# Allegro board DPU-C2.brd
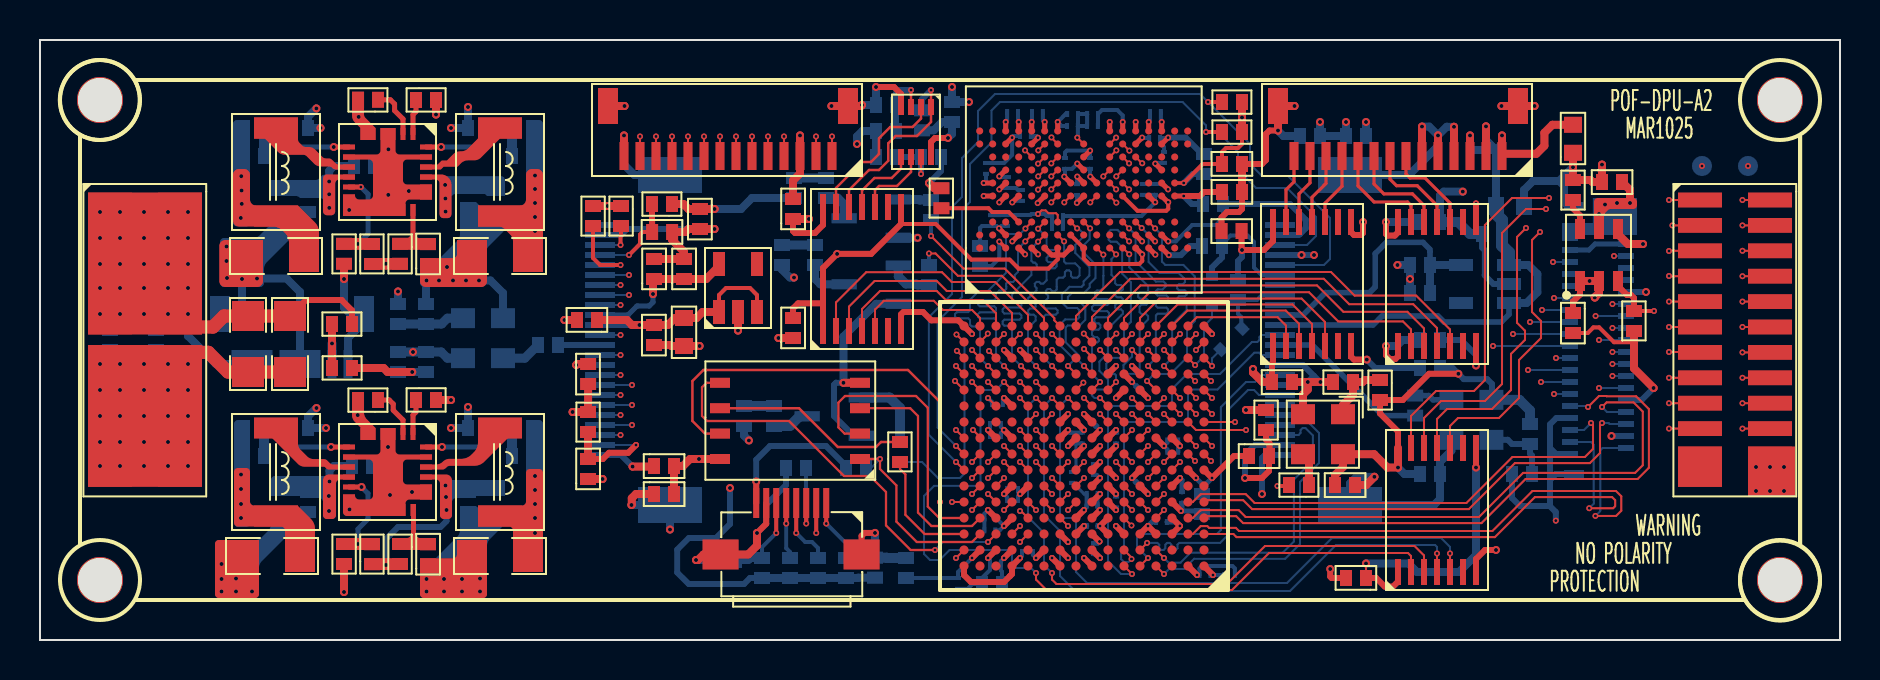
[diagram p0: board, top side]
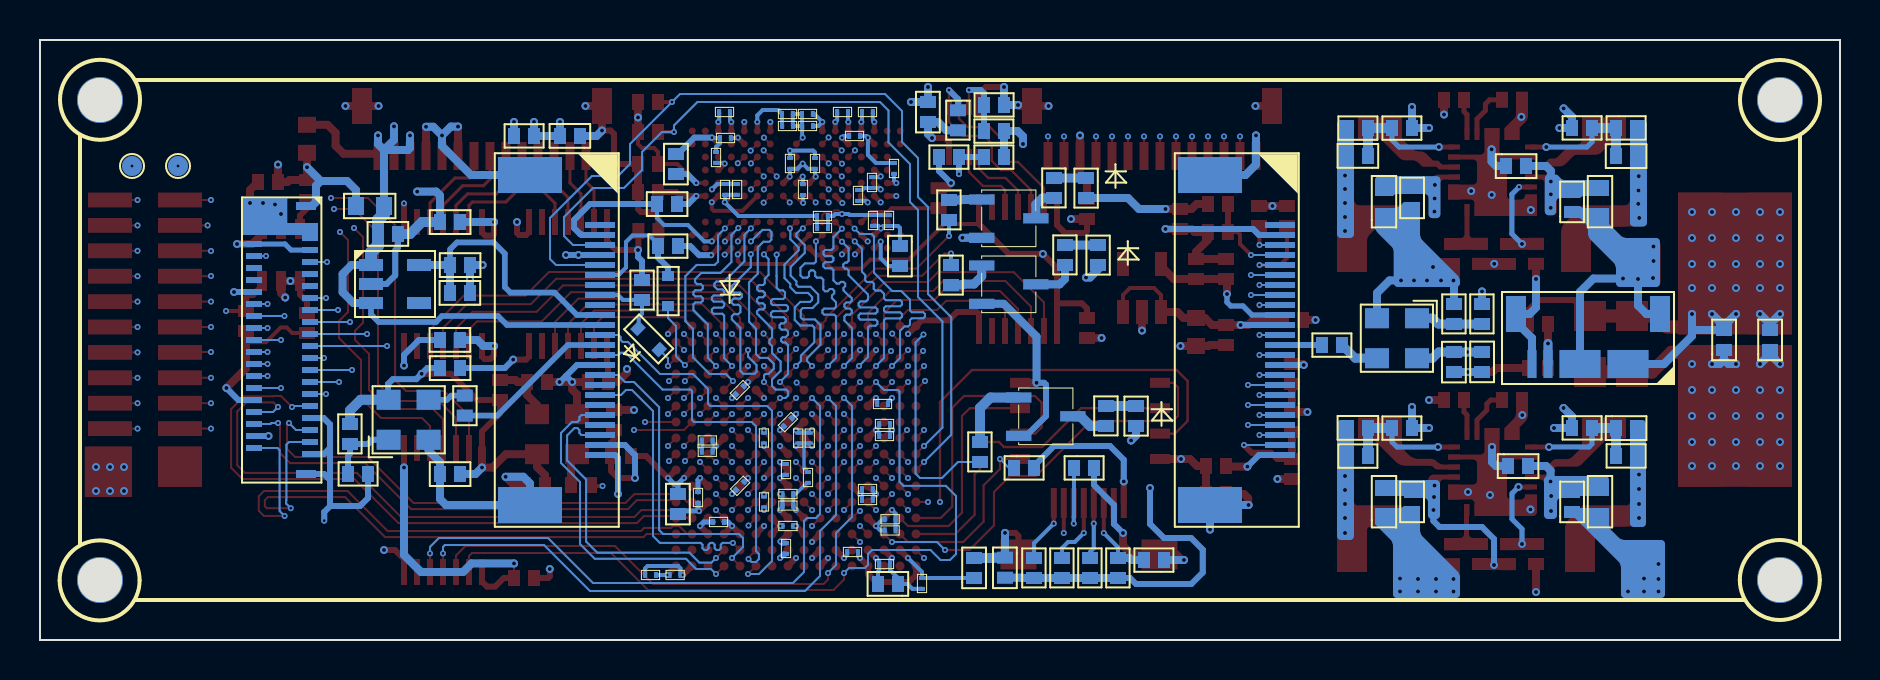
[diagram p1: board, bottom side, seen from below]

Outline 90 x 30 mm; copper layers: TOP, GND-2, SIG-3, VCC-4, GND-5, SIG-6, GND-7, BOTTOM. Coordinates in mm from the lower left corner of the outline.
Outline path: 0,30 90,30 90,0 0,0 0,30

## Design rules (mm)
constraint set DEFAULT: min track width 0.102
net group DQS0: nets DQS0N DQS0P
net group DQS1: nets DQS1N DQS1P
net group DVP_MCLK: nets DVP_MCLK N763219
net group IO_LED_1: nets IO_LED_1 N1593321
net group IO_LED_2: nets IO_LED_2 N1593325
net group IO_LED_3: nets IO_LED_3 N1593329
net group MCLK: nets MCLK N900708
net group MIPI1_CLK: nets MIPI1_CLK+ MIPI1_CLK-
net group MIPI1_D0: nets MIPI1_D0+ MIPI1_D0-
net group MIPI1_D1: nets MIPI1_D1+ MIPI1_D1-
net group MIPI2_CLK: nets MIPI2_CLK+ MIPI2_CLK-
net group MIPI2_D0: nets MIPI2_D0+ MIPI2_D0-
net group MIPI2_D1: nets MIPI2_D1+ MIPI2_D1-
net group MIPI_MCLK: nets MIPI_MCLK N2266172
net group P2V8: nets N1599549 N1613601
net group SYS_CLK: nets N990230 SYS_CLK
net group ADDRESS_BUS: nets CKE CKN CKP CS
net group MG_BT1120: nets BT1120_CLK BT1120_D0 BT1120_D1 BT1120_D2 BT1120_D3 BT1120_D4 BT1120_D5 BT1120_D6 BT1120_D7 SYNC_O
net group MG_DATABUS_0_7: nets DM0 DQ0 DQ1 DQ2 DQ3 DQ4 DQ5 DQ6 DQ7
net group MG_DATABUS_8_15: nets DM1 DQ8 DQ9 DQ10 DQ11 DQ12 DQ13 DQ14 DQ15
net group MG_DVP: nets DVP_D0 DVP_D1 DVP_D2 DVP_D3 DVP_D4 DVP_D5 DVP_D6 DVP_D7 DVP_HSYNC DVP_PCLK DVP_VSYNC
net group MG_IR_CAM: nets IR_D0 IR_D1 IR_D2 IR_D3 IR_D4 IR_D5 IR_D6 IR_D7 IR_D8 IR_D9 IR_D10 IR_D11 IR_D12 IR_D13 IR_HSYNC IR_PCLK IR_VSYNC

## Placement (name value [footprint] x y rotation side)
C1  10uF  [C0603_SMT]  76.65 24.36 90 top
C2  10uF  [C0402_SMT]  60.1 23.8 180 top
C3  10uF  [C0402_SMT]  78.1 22.9 0 top
C4  10uF  [C0402_SMT]  60.1 22.4 180 top
C5  0.1uF  [C0402_SMT]  37.65 21.05 90 top
C6  10uF  [C0402_SMT]  33 21.55 270 top
C7  0.1uF  [C0402_SMT]  59.08 20.45 0 top
C8  0.1uF  [C0402_SMT]  31.61 20.4 180 top
C9  1uF  [C0402_SMT]  19.4 18.8 90 top
C10  33uF  [C1206_SMT]  13.4 20 180 top
C11  47uF  [C1206_SMT]  24.6 20 180 top
C12  0.1uF  [C0402_SMT]  30.7 18.05 90 top
C13  10uF  [C0402_SMT]  32.2 18.05 90 top
C14  0.1uF  [C0402_SMT]  27.85 16 180 top
C15  10uF  [C0402_SMT]  76.65 16.35 270 top
C16  0.1uF  [C0402_SMT]  37.65 15.1 90 top
C17  10uF  [C0603_SMT]  32.2 16.1 270 top
C18  0.1uF  [C0402_SMT]  30.7 15.75 270 top
C19  33uF  [C1206_SMT]  9.6 16.4 270 top
C20  33uF  [C1206_SMT]  11.7 16.4 270 top
C21  10uF  [C0402_SMT]  27.41 13.8 270 top
C22  0.1uF  [C0402_SMT]  61.6 12.9 0 top
C23  0.1uF  [C0402_SMT]  60.45 9.2 0 top
C24  0.1uF  [C0402_SMT]  30.7 8.7 0 top
C25  0.1uF  [C0402_SMT]  27.4 8.05 90 top
C26  0.1uF  [C0402_SMT]  64.75 7.75 0 top
C27  10uF  [C0402_SMT]  30.7 7.3 0 top
C28  1uF  [C0402_SMT]  19.4 3.79 90 top
C29  33uF  [C1206_SMT]  13.2 5 180 top
C30  47uF  [C1206_SMT]  24.6 5 180 top
C31  0.1uF  [C0402_SMT]  66.3 3.1 180 top
C32  4.7uF  [C0201_SMT]  55.5 26.4 0 bottom
C33  0.1uF  [C0201_SMT]  49.6 26.4 0 bottom
C34  0.1uF  [C0201_SMT]  48.9 26.4 180 bottom
C35  0.1uF  [C0402_SMT]  45.6 26.9 270 bottom
C36  0.1uF  [C0201_SMT]  52.35 25.7 0 bottom
C37  0.1uF  [C0201_SMT]  51.35 25.7 0 bottom
C38  0.1uF  [C0201_SMT]  49 25.2 0 bottom
C39  4.7uF  [C0201_SMT]  56 25.1 180 bottom
C40  0.1uF  [C0402_SMT]  63 25.2 0 bottom
C41  39pF  [C0402_SMT]  23.6 24.2 0 bottom
C42  20pF  [C0402_SMT]  11.2 24.2 180 bottom
C43  0.1uF  [C0201_SMT]  56.2 24.4 270 bottom
C44  0.1uF  [C0201_SMT]  52.5 24.1 270 bottom
C45  0.1uF  [C0201_SMT]  51.25 24.1 270 bottom
C46  10uF  [C0402_SMT]  58.2 24.3 270 bottom
C47  10uF  [C0402_SMT]  16.7 23.7 180 bottom
C48  0.1uF  [C0201_SMT]  47.3 23.85 270 bottom
C49  0.1uF  [C0201_SMT]  48.4 22.6 90 bottom
C50  0.1uF  [C0201_SMT]  55.75 22.8 270 bottom
C51  0.1uF  [C0201_SMT]  51.85 22.25 90 bottom
C52  0.1uF  [C0201_SMT]  49.1 22.5 270 bottom
C53  0.1uF  [C0402_SMT]  21.4 21.6 90 bottom
C54  10uF  [C0603_SMT]  22.8 21.2 90 bottom
C55  10uF  [C0603_SMT]  12 21.2 90 bottom
C56  0.1uF  [C0402_SMT]  13.4 21.4 90 bottom
C57  10uF  [C0402_SMT]  59.15 21.8 180 bottom
C58  10uF  [C0603_SMT]  72.8 21.7 0 bottom
C59  0.1uF  [C0201_SMT]  47.55 20.7 90 bottom
C60  0.1uF  [C0402_SMT]  70 20.9 180 bottom
C61  0.1uF  [C0201_SMT]  50.6 20.6 0 bottom
C62  0.1uF  [C0402_SMT]  72.1 20.3 0 bottom
C63  10uF  [C0402_SMT]  47 19.7 270 bottom
C64  10uF  [C0402_SMT]  69.5 18.75 180 bottom
C65  0.1uF  [C0402_SMT]  68.5 17.35 0 bottom
C66  10uF  [C0402_SMT]  5.8 14.5 90 bottom
C67  10uF  [C0402_SMT]  3.5 14.5 90 bottom
C68  0.1uF  [C0402_SMT]  69 15 0 bottom
C69  10uF  [C0402_SMT]  17.9 13.4 90 bottom
C70  0.1uF  [C0402_SMT]  19.3 14.4 270 bottom
C71  4.7uF  [C0201_SMT]  55.15 22.8 270 bottom
C72  0.1uF  [C0402_SMT]  70 13.6 180 bottom
C73  0.1uF  [C0201_SMT]  55.2 12.3 135 bottom
C74  0.1uF  [C0201_SMT]  47.6 11.8 0 bottom
C75  0.1uF  [C0201_SMT]  52.8 10.7 135 bottom
C76  4.7uF  [C0201_SMT]  47.5 10.8 0 bottom
C77  200pF  [C0402_SMT]  23.6 10.6 0 bottom
C78  100pF  [C0402_SMT]  11.2 10.6 180 bottom
C79  0.1uF  [C0201_SMT]  47.5 10.2 0 bottom
C80  0.1uF  [C0201_SMT]  53.8 9.83 90 bottom
C81  0.1uF  [C0201_SMT]  52.09 10.37 270 bottom
C82  0.1uF  [C0201_SMT]  51.51 10.37 270 bottom
C83  0.1uF  [C0201_SMT]  56.91 9.98 180 bottom
C84  4.7uF  [C0201_SMT]  56.91 9.41 180 bottom
C85  10uF  [C0402_SMT]  16.6 8.7 180 bottom
C86  0.1uF  [C0201_SMT]  52.7 8.8 270 bottom
C87  0.1uF  [C0402_SMT]  70 8.3 180 bottom
C88  4.7uF  [C0201_SMT]  51.6 8.4 270 bottom
C89  0.1uF  [C0201_SMT]  54.8 7.9 315 bottom
C90  4.7uF  [C0201_SMT]  48.9 7.55 180 bottom
C91  4.7uF  [C0201_SMT]  52.88 7.3 180 bottom
C92  0.1uF  [C0201_SMT]  57.1 7.4 270 bottom
C93  0.1uF  [C0201_SMT]  48.9 7 180 bottom
C94  10uF  [C0603_SMT]  22.8 6.2 90 bottom
C95  10uF  [C0603_SMT]  12 6.2 90 bottom
C96  0.1uF  [C0402_SMT]  21.4 6.4 90 bottom
C97  0.1uF  [C0402_SMT]  13.4 6.4 90 bottom
C98  4.7uF  [C0201_SMT]  53.8 6.63 90 bottom
C99  10uF  [C0402_SMT]  58.1 7.3 270 bottom
C100  0.1uF  [C0201_SMT]  52.33 6.72 0 bottom
C101  4.7uF  [C0201_SMT]  47.22 6.04 0 bottom
C102  0.1uF  [C0201_SMT]  55.8 5.9 0 bottom
C103  0.1uF  [C0201_SMT]  52.88 5.7 180 bottom
C104  0.1uF  [C0201_SMT]  47.22 5.48 0 bottom
C105  0.1uF  [C0201_SMT]  52.7 4.3 90 bottom
C106  0.1uF  [C0201_SMT]  49.1 4.4 0 bottom
C107  0.1uF  [C0201_SMT]  47.5 3.8 0 bottom
C108  10uF  [C0402_SMT]  43.3 3.1 90 bottom
C109  10uF  [C0402_SMT]  41.75 4.11 270 bottom
C110  0.1uF  [C0201_SMT]  59.2 3.25 0 bottom
C111  0.1uF  [C0201_SMT]  58.52 3.25 180 bottom
C112  0.1uF  [C0201_SMT]  45.9 3.1 270 bottom
C113  10uF  [C0402_SMT]  47.1 2.8 0 bottom
D1  LED  [LED0402_SMT]  37.7 23.1 270 bottom
D2  LED  [LED0402_SMT]  37.1 19.75 270 bottom
D3  1N5819WT  [SOD-523]  58.6 16.7 90 bottom
D4  1N5819WT  [SOD-523]  59.04 14.52 45 bottom
D5  LED  [LED0402_SMT]  35.2 11.7 270 bottom
FB1  BLM18PG121SN1D  [L0402_SMT]  31.6 21.8 180 top
FB2  BLM18PG121SN1D  [L0402_SMT]  61.3 11.5 270 top
FB3  BLM18PG121SN1D  [L0402_SMT]  27.4 11.4 270 top
FB4  BLM18PG121SN1D  [L0402_SMT]  66.3 25.2 180 bottom
J1  CONN-1X14P-0.8MM  [CONN-1X14P-0D8]  39.6 24.2 180 top
J2  CONN-1X14P-0.8MM  [CONN-1X14P-0D8]  73.1 24.2 180 top
J3  CONN-24P  [SMD_CONN_2X12P_1D27]  7 22 270 top
J4  CONN-24P  [SMD_CONN_2X12P_1D27]  86.5 22 270 top
J5  CONN-1X8  [FPC-0D5-8P]  39.31 6.85 180 top
J6  CONN-1X8P-0.8MM  [CONN-1X8P-0D8]  9.8 13.8 0 bottom
J7  Hirose FH35C-39S-0.3SHW  [FH35C-39S-0D3SHW]  76.5 15 90 bottom
J8  FPC-05F-24PH20  [FPC-0D5-24P]  62 20.75 270 bottom
J9  FPC-05F-24PH20  [FPC-0D5-24P]  28 20.75 270 bottom
L1  1uH/1A  [IND_SMD_4D4X4D2]  11.8 25.6 270 top
L2  1uH/1A  [IND_SMD_4D4X4D2]  23 25.6 270 top
L3  1uH/1A  [IND_SMD_4D4X4D2]  11.8 10.6 270 top
L4  1uH/1A  [IND_SMD_4D4X4D2]  23 10.6 270 top
NOREF  -  [unnamed]  87 3 0 top
NOREF#2  -  [#2]  0 0 90 top
NOREF#3  -  [unnamed]  3 27 0 top
NOREF#4  -  [unnamed]  3 3 0 top
NOREF#5  -  [unnamed]  87 27 0 top
NOREF#6  -  [#2]  0 30 0 top
Q1  MMBT2222ALT1G  [SOT-23-3]  43.35 22.5 270 bottom
Q2  MMBT2222ALT1G  [SOT-23-3]  43.35 19.2 270 bottom
Q3  MMBT2222ALT1G  [SOT-23-3]  41.5 12.6 270 bottom
R1  10K  [R0402_SMT]  16.9 27.01 180 top
R2  10K  [R0402_SMT]  18.8 27 0 top
R3  10K  [R0402_SMT]  60.1 26.9 180 top
R4  10K  [R0402_SMT]  60.1 25.4 180 top
R5  1K  [R0402_SMT]  76.64 23 270 top
R6  240R  [R0402_SMT]  45.07 21.59 90 top
R7  10K  [R0402_SMT]  27.65 21.7 270 top
R8  10K  [R0402_SMT]  29.05 21.7 270 top
R9  DNP  [R0402_SMT]  15.2 19.81 270 top
R10  0  [R0402_SMT]  16.6 18.8 90 top
R11  10  [R0402_SMT]  18 19.81 270 top
R12  100K  [R0402_SMT]  79.7 15.45 90 top
R13  0  [R0402_SMT]  15.6 15.8 180 top
R14  DNP  [R0402_SMT]  14.6 13.6 0 top
R15  DNP  [R0402_SMT]  65.65 12.9 180 top
R16  0R  [R0402_SMT]  67 13 270 top
R17  10K  [R0402_SMT]  18.8 12 0 top
R18  10K  [R0402_SMT]  16.9 12 180 top
R19  33  [R0402_SMT]  43 8.9 90 top
R20  33  [R0402_SMT]  63.45 7.75 180 top
R21  DNP  [R0402_SMT]  15.2 4.8 270 top
R22  0  [R0402_SMT]  16.6 3.79 90 top
R23  10  [R0402_SMT]  18 4.8 270 top
R24  DNP  [R0402_SMT]  42.8 26.75 180 bottom
R25  10K  [R0201_SMT]  52.9 26.3 180 bottom
R26  10K  [R0201_SMT]  51.9 26.3 180 bottom
R27  10K  [R0402_SMT]  44.1 25.48 90 bottom
R28  48K  [R0402_SMT]  13.4 25.6 180 bottom
R29  120K  [R0402_SMT]  11.2 25.6 180 bottom
R30  125K  [R0402_SMT]  23.6 25.6 0 bottom
R31  100K  [R0402_SMT]  21.4 25.6 0 bottom
R32  10K  [R0402_SMT]  41.8 25.45 0 bottom
R33  DNP  [R0402_SMT]  44.05 24.15 0 bottom
R34  10K  [R0402_SMT]  41.8 24.15 0 bottom
R35  20K  [R0402_SMT]  39.3 22.1 90 bottom
R36  1K  [R0402_SMT]  44.55 21 90 bottom
R37  10K  [R0201_SMT]  51.15 21.2 180 bottom
R38  10K  [R0201_SMT]  48.35 21.25 270 bottom
R39  4.7K  [R0402_SMT]  58.1 19.7 0 bottom
R40  20K  [R0402_SMT]  38.75 18.75 90 bottom
R41  1K  [R0402_SMT]  44.45 18.75 270 bottom
R42  4.7K  [R0402_SMT]  59.9 18 270 bottom
R43  DNP  [R0402_SMT]  19.3 15.8 90 bottom
R44  0R  [R0402_SMT]  17.9 15.8 90 bottom
R45  33  [R0402_SMT]  24.9 14.75 0 bottom
R46  33  [R0402_SMT]  68.76 12.22 270 bottom
R47  20K  [R0402_SMT]  36.7 10.7 90 bottom
R48  100K  [R0402_SMT]  13.4 10.6 180 bottom
R49  100K  [R0402_SMT]  21.4 10.6 0 bottom
R50  0R  [R0402_SMT]  74.5 9.8 90 bottom
R51  1K  [R0402_SMT]  43 8.9 90 bottom
R52  49.9K  [R0402_SMT]  11.2 9.2 180 bottom
R53  24.9K  [R0402_SMT]  23.6 9.2 0 bottom
R54  4.7K  [R0402_SMT]  41.3 8.6 180 bottom
R55  2.2K  [R0402_SMT]  38.3 8.6 180 bottom
R56  DNP  [R0402_SMT]  74.6 8.3 180 bottom
R57  DNP  [R0402_SMT]  33.8 4 0 bottom
R58  4.7K  [R0402_SMT]  40.3 3.1 90 bottom
R59  4.7K  [R0402_SMT]  38.9 3.1 90 bottom
R60  4.7K  [R0402_SMT]  37.5 3.1 90 bottom
R61  0R  [R0402_SMT]  36.1 3.1 90 bottom
TP1  T POINT R  [TP_SMD_1D0_NP]  85.4 23.7 180 bottom
TP2  T POINT R  [TP_SMD_1D0_NP]  83.1 23.7 180 bottom
U1  CAT25512HU5I-GT3  [UDFN-8-2X3]  44.55 24.15 180 top
U2  MAX20416ATGD/V+  [TQFN-24]  17.4 23.4 180 top
U3  IS43LD16640C-25BLI  [BGA-134-0D65]  46.98 19.6 90 top
U4  TPS22995H-Q1  [SOT-23-6]  77 17.95 90 top
U5  TXB0104PWR  [TSSOP-14]  39.15 15.45 90 top
U6  TXB0104PWR  [TSSOP-14]  61.65 14.7 90 top
U7  TXB0104PWR  [TSSOP-14]  67.9 14.7 90 top
U8  TLV75515PDBVR  [SOT-23-5]  33.95 16.4 90 top
U9  GD25Q128ESIGR  [SOP-8-208MIL]  34 9.05 90 top
U10  LIFCL-40-BG256  [CABGA-256]  58.2 3.7 180 top
U11  MAX20416ATGD/V+  [TQFN-24]  17.4 8.4 180 top
U12  TXB0104PWR  [TSSOP-14]  67.9 3.4 90 top
U13  TLV75515PDBVR  [SOT-23-5]  73.45 18.75 180 bottom
Y1  25.0MHz  [SMD2520-4P]  64.15 10.25 180 top
Y2  24.0MHz  [SMD2520-4P]  22.15 15.05 0 bottom
Y3  24.0MHz  [SMD2520-4P]  71.57 11.05 180 bottom

## Library data of the parts
C1 C10 C11 C13 C17 C19 C20 C29 C30 C58 C64 = CAP NP: signal model: DEFAULT_CAPACITOR_2.2e+07pF_2_1
C2-C9 C12 C14-C16 C18 C21-C28 C31-C57 C59-C63 C65-C113 = CAP NP: signal model: DEFAULT_CAPACITOR_1e+07pF_2_1
D1 D2 D5 = LED
D3 D4 = DIODE
FB1-FB4 = INDUCTOR
J1 J2 = CONN-1X14P
J3 J4 = CONN-24P
J5 = CONN-1X8
J6 = CONN-1X8P
J7 = HiroseFPC_0
J8 = OV5640-FPC-24P-MIPI
J9 = OV5640-FPC-24P-DVP
L1-L4 = INDUCTOR: signal model: DEFAULT_INDUCTOR_4700nH_2_1
Q1-Q3 = MMBT2222AL
R1-R4 R7-R11 R13-R24 R27-R34 R36 R39 R41-R46 R48-R61 = R: signal model: DEFAULT_RESISTOR_10000OHM_2_1
R5 R6 R12 R25 R26 R35 R37 R38 R40 R47 = R
TP1 TP2 = T POINT R
U1 = CAT25512HU5I-GT3
U2 U11 = MAX20416ATGD/V+
U3 = IS43LD16640C-25BLI
U4 = TPS22995H-Q1
U5-U7 U12 = TXB0104PWR
U8 U13 = TLV75515PDBVR
U9 = GD25Q128ESIGR
U10 = LIFCL-40-BG256
Y1-Y3 = OSCILLATOR

## Footprints (pads in the part's own frame, mm; a bottom-side part is the same pattern mirrored in y, then rotated)
BGA-134-0D65
  round 0.35 smd: A1(0,0) A2(0.65,0) A9(5.2,0) A10(5.85,0) B1(0,-0.65) B2(0.65,-0.65) B3(1.3,-0.65) B5(2.6,-0.65) B6(3.25,-0.65) B7(3.9,-0.65) B8(4.55,-0.65) B9(5.2,-0.65) B10(5.85,-0.65) C1(0,-1.3) C2(0.65,-1.3) C3(1.3,-1.3) C5(2.6,-1.3) C6(3.25,-1.3) C7(3.9,-1.3) C8(4.55,-1.3) C9(5.2,-1.3) C10(5.85,-1.3) D1(0,-1.95) D2(0.65,-1.95) D3(1.3,-1.95) D5(2.6,-1.95) D6(3.25,-1.95) D7(3.9,-1.95) D8(4.55,-1.95) D9(5.2,-1.95) D10(5.85,-1.95) E1(0,-2.6) E2(0.65,-2.6) E3(1.3,-2.6) E5(2.6,-2.6) E6(3.25,-2.6) E7(3.9,-2.6) E8(4.55,-2.6) E9(5.2,-2.6) E10(5.85,-2.6) F1(0,-3.25) F2(0.65,-3.25) F3(1.3,-3.25) F5(2.6,-3.25) F6(3.25,-3.25) F7(3.9,-3.25) F8(4.55,-3.25) F9(5.2,-3.25) F10(5.85,-3.25) G1(0,-3.9) G2(0.65,-3.9) G3(1.3,-3.9) G5(2.6,-3.9) G6(3.25,-3.9) G7(3.9,-3.9) G8(4.55,-3.9) G9(5.2,-3.9) G10(5.85,-3.9) H1(0,-4.55) H2(0.65,-4.55) H3(1.3,-4.55) H5(2.6,-4.55) H6(3.25,-4.55) J1(0,-5.2) J2(0.65,-5.2) J3(1.3,-5.2) J5(2.6,-5.2) J6(3.25,-5.2) J7(3.9,-5.2) J8(4.55,-5.2) J9(5.2,-5.2) K1(0,-5.85) K2(0.65,-5.85) K3(1.3,-5.85) K5(2.6,-5.85) K6(3.25,-5.85) L1(0,-6.5) L2(0.65,-6.5) L3(1.3,-6.5) L5(2.6,-6.5) L6(3.25,-6.5) L7(3.9,-6.5) L8(4.55,-6.5) L9(5.2,-6.5) L10(5.85,-6.5) M1(0,-7.15) M2(0.65,-7.15) M3(1.3,-7.15) M5(2.6,-7.15) M6(3.25,-7.15) M7(3.9,-7.15) M8(4.55,-7.15) M9(5.2,-7.15) M10(5.85,-7.15) N1(0,-7.8) N2(0.65,-7.8) N3(1.3,-7.8) N5(2.6,-7.8) N6(3.25,-7.8) N7(3.9,-7.8) N8(4.55,-7.8) N9(5.2,-7.8) N10(5.85,-7.8) P1(0,-8.45) P2(0.65,-8.45) P3(1.3,-8.45) P5(2.6,-8.45) P6(3.25,-8.45) P7(3.9,-8.45) P8(4.55,-8.45) P9(5.2,-8.45) P10(5.85,-8.45) R1(0,-9.1) R2(0.65,-9.1) R3(1.3,-9.1) R5(2.6,-9.1) R6(3.25,-9.1) R7(3.9,-9.1) R8(4.55,-9.1) R9(5.2,-9.1) R10(5.85,-9.1) T1(0,-9.75) T2(0.65,-9.75) T3(1.3,-9.75) T5(2.6,-9.75) T6(3.25,-9.75) T7(3.9,-9.75) T8(4.55,-9.75) T9(5.2,-9.75) T10(5.85,-9.75) U1(0,-10.4) U2(0.65,-10.4) U9(5.2,-10.4) U10(5.85,-10.4)
C0201_SMT
  rect 0.2x0.3 smd: 1(0,0) 2(0.544,0)
C0402_SMT
  rect 0.6x0.8 smd: 1(0,0) 2(1,0)
C0603_SMT
  rect 0.8x0.9 smd: 1(0,0) 2(1.4,0)
C1206_SMT
  rect 1.5x1.6 smd: 1(0.2,0.8) 2(3,0.8)
CABGA-256
  round 0.45 smd: A1(0,0) A2(0.8,0) A3(1.6,0) A4(2.4,0) A5(3.2,0) A6(4,0) A7(4.8,0) A8(5.6,0) A9(6.4,0) A10(7.2,0) A11(8,0) A12(8.8,0) A13(9.6,0) A14(10.4,0) A15(11.2,0) A16(12,0) B1(0,-0.8) B2(0.8,-0.8) B3(1.6,-0.8) B4(2.4,-0.8) B5(3.2,-0.8) B6(4,-0.8) B7(4.8,-0.8) B8(5.6,-0.8) B9(6.4,-0.8) B10(7.2,-0.8) B11(8,-0.8) B12(8.8,-0.8) B13(9.6,-0.8) B14(10.4,-0.8) B15(11.2,-0.8) B16(12,-0.8) C1(0,-1.6) C2(0.8,-1.6) C3(1.6,-1.6) C4(2.4,-1.6) C5(3.2,-1.6) C6(4,-1.6) C7(4.8,-1.6) C8(5.6,-1.6) C9(6.4,-1.6) C10(7.2,-1.6) C11(8,-1.6) C12(8.8,-1.6) C13(9.6,-1.6) C14(10.4,-1.6) C15(11.2,-1.6) C16(12,-1.6) D1(0,-2.4) D2(0.8,-2.4) D3(1.6,-2.4) D4(2.4,-2.4) D5(3.2,-2.4) D6(4,-2.4) D7(4.8,-2.4) D8(5.6,-2.4) D9(6.4,-2.4) D10(7.2,-2.4) D11(8,-2.4) D12(8.8,-2.4) D13(9.6,-2.4) D14(10.4,-2.4) D15(11.2,-2.4) D16(12,-2.4) E1(0,-3.2) E2(0.8,-3.2) E3(1.6,-3.2) E4(2.4,-3.2) E5(3.2,-3.2) E6(4,-3.2) E7(4.8,-3.2) E8(5.6,-3.2) E9(6.4,-3.2) E10(7.2,-3.2) E11(8,-3.2) E12(8.8,-3.2) E13(9.6,-3.2) E14(10.4,-3.2) E15(11.2,-3.2) E16(12,-3.2) F1(0,-4) F2(0.8,-4) F3(1.6,-4) F4(2.4,-4) F5(3.2,-4) F6(4,-4) F7(4.8,-4) F8(5.6,-4) F9(6.4,-4) F10(7.2,-4) F11(8,-4) F12(8.8,-4) F13(9.6,-4) F14(10.4,-4) F15(11.2,-4) F16(12,-4) G1(0,-4.8) G2(0.8,-4.8) G3(1.6,-4.8) G4(2.4,-4.8) G5(3.2,-4.8) G6(4,-4.8) G7(4.8,-4.8) G8(5.6,-4.8) G9(6.4,-4.8) G10(7.2,-4.8) G11(8,-4.8) G12(8.8,-4.8) G13(9.6,-4.8) G14(10.4,-4.8) G15(11.2,-4.8) G16(12,-4.8) H1(0,-5.6) H2(0.8,-5.6) H3(1.6,-5.6) H4(2.4,-5.6) H5(3.2,-5.6) H6(4,-5.6) H7(4.8,-5.6) H8(5.6,-5.6) H9(6.4,-5.6) H10(7.2,-5.6) H11(8,-5.6) H12(8.8,-5.6) H13(9.6,-5.6) H14(10.4,-5.6) H15(11.2,-5.6) H16(12,-5.6) J1(0,-6.4) J2(0.8,-6.4) J3(1.6,-6.4) J4(2.4,-6.4) J5(3.2,-6.4) J6(4,-6.4) J7(4.8,-6.4) J8(5.6,-6.4) J9(6.4,-6.4) J10(7.2,-6.4) J11(8,-6.4) J12(8.8,-6.4) J13(9.6,-6.4) J14(10.4,-6.4) J15(11.2,-6.4) J16(12,-6.4) K1(0,-7.2) K2(0.8,-7.2) K3(1.6,-7.2) K4(2.4,-7.2) K5(3.2,-7.2) K6(4,-7.2) K7(4.8,-7.2) K8(5.6,-7.2) K9(6.4,-7.2) K10(7.2,-7.2) K11(8,-7.2) K12(8.8,-7.2) K13(9.6,-7.2) K14(10.4,-7.2) K15(11.2,-7.2) K16(12,-7.2) L1(0,-8) L2(0.8,-8) L3(1.6,-8) L4(2.4,-8) L5(3.2,-8) L6(4,-8) L7(4.8,-8) L8(5.6,-8) L9(6.4,-8) L10(7.2,-8) L11(8,-8) L12(8.8,-8) L13(9.6,-8) L14(10.4,-8) L15(11.2,-8) L16(12,-8) M1(0,-8.8) M2(0.8,-8.8) M3(1.6,-8.8) M4(2.4,-8.8) M5(3.2,-8.8) M6(4,-8.8) M7(4.8,-8.8) M8(5.6,-8.8) M9(6.4,-8.8) M10(7.2,-8.8) M11(8,-8.8) M12(8.8,-8.8) M13(9.6,-8.8) M14(10.4,-8.8) M15(11.2,-8.8) M16(12,-8.8) N1(0,-9.6) N2(0.8,-9.6) N3(1.6,-9.6) N4(2.4,-9.6) N5(3.2,-9.6) N6(4,-9.6) N7(4.8,-9.6) N8(5.6,-9.6) N9(6.4,-9.6) N10(7.2,-9.6) N11(8,-9.6) N12(8.8,-9.6) N13(9.6,-9.6) N14(10.4,-9.6) N15(11.2,-9.6) N16(12,-9.6) P1(0,-10.4) P2(0.8,-10.4) P3(1.6,-10.4) P4(2.4,-10.4) P5(3.2,-10.4) P6(4,-10.4) P7(4.8,-10.4) P8(5.6,-10.4) P9(6.4,-10.4) P10(7.2,-10.4) P11(8,-10.4) P12(8.8,-10.4) P13(9.6,-10.4) P14(10.4,-10.4) P15(11.2,-10.4) P16(12,-10.4) R1(0,-11.2) R2(0.8,-11.2) R3(1.6,-11.2) R4(2.4,-11.2) R5(3.2,-11.2) R6(4,-11.2) R7(4.8,-11.2) R8(5.6,-11.2) R9(6.4,-11.2) R10(7.2,-11.2) R11(8,-11.2) R12(8.8,-11.2) R13(9.6,-11.2) R14(10.4,-11.2) R15(11.2,-11.2) R16(12,-11.2) T1(0,-12) T2(0.8,-12) T3(1.6,-12) T4(2.4,-12) T5(3.2,-12) T6(4,-12) T7(4.8,-12) T8(5.6,-12) T9(6.4,-12) T10(7.2,-12) T11(8,-12) T12(8.8,-12) T13(9.6,-12) T14(10.4,-12) T15(11.2,-12) T16(12,-12)
CONN-1X8P-0D8
  rect 0.45x1.4 smd: 1(0,0) 2(0.8,0) 3(1.6,0) 4(2.4,0) 5(3.2,0) 6(4,0) 7(4.8,0) 8(5.6,0)
  rect 1x1.8 smd: 9(-0.8,-2.5) 10(6.4,-2.5)
CONN-1X14P-0D8
  rect 0.45x1.4 smd: 1(0,0) 2(0.8,0) 3(1.6,0) 4(2.4,0) 5(3.2,0) 6(4,0) 7(4.8,0) 8(5.6,0) 9(6.4,0) 10(7.2,0) 11(8,0) 12(8.8,0) 13(9.6,0) 14(10.4,0)
  rect 1x1.8 smd: 15(11.2,-2.5) 16(-0.8,-2.5)
FH35C-39S-0D3SHW
  rect 0.3x0.8 smd: 1(5.7,0) 2(5.4,2.8) 3(5.1,0) 4(4.8,2.8) 5(4.5,0) 6(4.2,2.8) 7(3.9,0) 8(3.6,2.8) 9(3.3,0) 10(3,2.8) 11(2.7,0) 12(2.4,2.8) 13(2.1,0) 14(1.8,2.8) 15(1.5,0) 16(1.2,2.8) 17(0.9,0) 18(0.6,2.8) 19(0.3,0) 20(0,2.8) 21(-0.3,0) 22(-0.6,2.8) 23(-0.9,0) 24(-1.2,2.8) 25(-1.5,0) 26(-1.8,2.8) 27(-2.1,0) 28(-2.4,2.8) 29(-2.7,0) 30(-3,2.8) 31(-3.3,0) 32(-3.6,2.8) 33(-3.9,0) 34(-4.2,2.8) 35(-4.5,0) 36(-4.8,2.8) 37(-5.1,0) 38(-5.4,2.8) 39(-5.7,0)
  rect 0.4x1 smd: 40(6.7,0.2) 41(-6.7,0.2)
FPC-0D5-8P
  rect 0.3x1.5 smd: 1(0,0) 2(0.5,0) 3(1,0) 4(1.5,0) 5(2,0) 6(2.5,0) 7(3,0) 8(3.5,0)
  rect 1.8x1.5 smd: 9(-1.767,2.573) 10(5.283,2.573)
FPC-0D5-24P
  rect 0.3x1.5 smd: 1(0,0) 2(0.5,0) 3(1,0) 4(1.5,0) 5(2,0) 6(2.5,0) 7(3,0) 8(3.5,0) 9(4,0) 10(4.5,0) 11(5,0) 12(5.5,0) 13(6,0) 14(6.5,0) 15(7,0) 16(7.5,0) 17(8,0) 18(8.5,0) 19(9,0) 20(9.5,0) 21(10,0) 22(10.5,0) 23(11,0) 24(11.5,0)
  rect 1.8x3.2 smd: 25(-2.5,-3.5) 26(14,-3.5)
IND_SMD_4D4X4D2
  rect 1.05x2.2 smd: 1(0,0) 2(4.4,0)
L0402_SMT
  rect 0.6x0.8 smd: 1(0,0) 2(1,0)
LED0402_SMT
  rect 0.6x0.8 smd: 1(0,0) 2(1,0)
R0201_SMT
  rect 0.2x0.3 smd: 1(0,0) 2(0.544,0)
R0402_SMT
  rect 0.6x0.8 smd: 1(0,0) 2(1,0)
SMD2520-4P
  rect 1.2x1 smd: 1(-1,-1.04) 2(1,-1.04) 3(1,0.96) 4(-1,0.96)
SMD_CONN_2X12P_1D27
  rect 0.74x2.2 smd: 1(0,-3.5) 2(1.27,-3.5) 3(2.54,-3.5) 4(3.81,-3.5) 5(5.08,-3.5) 6(6.35,-3.5) 7(7.62,-3.5) 8(8.89,-3.5) 9(10.16,-3.5) 10(11.43,-3.5) 11(12.7,-3.5) 12(13.97,-3.5) 13(13.97,0) 14(12.7,0) 15(11.43,0) 16(10.16,0) 17(8.89,0) 18(7.62,0) 19(6.35,0) 20(5.08,0) 21(3.81,0) 22(2.54,0) 23(1.27,0) 24(0,0)
SOD-523
  rect 0.5x0.6 smd: 1(0,0) 2(1.5,0)
SOP-8-208MIL
  rect 0.5x1 smd: 1(0,-7) 2(1.27,-7) 3(2.54,-7) 4(3.81,-7) 5(3.81,0) 6(2.54,0) 7(1.27,0) 8(0,0)
SOT-23-3
  rect 0.51x1.27 smd: 1(0.476,0.434) 2(2.391,0.434) 3(1.415,3.142)
SOT-23-5
  rect 1.2x0.6 smd: 1(0,0) 2(0,-0.95) 3(0,-1.9) 4(2.4,-1.9) 5(2.4,0)
SOT-23-6
  rect 1x0.5 smd: 1(0,0) 2(0,-0.95) 3(0,-1.9) 4(2.6,-1.9) 5(2.6,-0.95) 6(2.6,0)
TP_SMD_1D0_NP
  round 1 smd: 1(0,0)
TQFN-24
  rect 0.25x0.6 smd: 1(-1.25,-1.9) 2(-0.75,-1.9) 3(-0.25,-1.9) 4(0.25,-1.9) 5(0.75,-1.9) 6(1.25,-1.9) 13(1.25,1.9) 14(0.75,1.9) 15(0.25,1.9) 16(-0.25,1.9) 17(-0.75,1.9) 18(-1.25,1.9)
  rect 0.6x0.25 smd: 7(1.95,-1.25) 8(1.95,-0.75) 9(1.95,-0.25) 10(1.95,0.25) 11(1.95,0.75) 12(1.95,1.25) 19(-1.9,1.25) 20(-1.9,0.75) 21(-1.9,0.25) 22(-1.9,-0.25) 23(-1.9,-0.75) 24(-1.9,-1.25)
  rect 1.5x1.5 smd: EPAD(0,0)
TSSOP-14
  rect 1.3x0.3 smd: 1(0,0) 2(0,-0.65) 3(0,-1.3) 4(0,-1.95) 5(0,-2.6) 6(0,-3.25) 7(0,-3.9) 8(6.2,-3.9) 9(6.2,-3.25) 10(6.2,-2.6) 11(6.2,-1.95) 12(6.2,-1.3) 13(6.2,-0.65) 14(6.2,0)
UDFN-8-2X3
  rect 0.3x0.8 smd: 1(0,-2.5) 2(0.5,-2.5) 3(1,-2.5) 4(1.5,-2.5) 5(1.5,0) 6(1,0) 7(0.5,0) 8(0,0)
unnamed
  round 2.3 hole 2.2 unplated: (0,0)

## Nets
GND: C1.1 C2.1 C3.1 C4.1 C5.2 C6.2 C7.1 C8.1 C9.1 C10.2 C11.2 C12.2 C13.2 C14.2 C15.2 C16.1 C17.2 C18.2 C19.2 C20.2 C21.1 C22.2 C23.1 C24.1 C25.1 C26.2 C27.1 C28.1 C29.2 C30.2 C31.2 C32.1 C33.1 C34.1 C35.1 C37.1 C38.1 C39.1 C40.1 C43.1 C44.1 C45.1 C46.1 C47.1 C48.1 C49.1 C50.1 C51.1 C52.1 C53.1 C54.1 C55.1 C56.1 C57.1 C58.2 C59.1 C60.1 C62.1 C63.1 C64.2 C65.1 C66.1 C67.1 C68.2 C69.1 C70.2 C71.1 C72.2 C73.1 C74.2 C75.1 C76.1 C79.1 C80.2 C81.2 C82.2 C83.1 C84.1 C85.1 C86.1 C87.1 C88.1 C89.1 C90.1 C91.1 C92.1 C93.1 C94.1 C95.1 C96.1 C97.1 C98.1 C99.1 C100.2 C101.1 C102.2 C103.2 C104.1 C105.1 C106.1 C107.1 C108.2 C109.1 C110.1 C111.1 C112.2 C113.1 J1.3 J1.14 J1.15 J1.16 J2.4 J2.5 J2.6 J2.15 J2.16 J3.7 J3.8 J3.9 J3.10 J3.11 J3.12 J3.13 J3.14 J3.15 J3.16 J3.17 J3.18 J4.13 J4.14 J5.7 J5.9 J5.10 J6.4 J6.5 J6.6 J6.8 J6.9 J6.10 J7.4 J7.5 J7.12 J7.30 J7.33 J7.36 J7.39 J7.40 J7.41 J8.2 J8.15 J8.24 J8.25 J8.26 J9.2 J9.15 J9.24 J9.25 J9.26 Q1.2(EMITTER) Q2.2(EMITTER) Q3.2(EMITTER) R5.1 R6.2 R9.2 R12.1 R14.2 R15.2 R21.2 R24.2 R26.2 R28.1 R31.1 R33.2 R38.2 R43.2 R48.1 R49.1 R55.2 R56.2 R57.1 U1.4 U2.3 U2.4 U2.8 U2.12 U2.13 U2.14 U2.15 U2.16 U2.17 U2.19 U2.20 U2.23 U2.EPAD U3.C2 U3.C5 U3.C6 U3.C9 U3.D1 U3.D10 U3.E1 U3.E10 U3.F5 U3.G10 U3.H2 U3.J1 U3.J5 U3.J8 U3.L10 U3.M5 U3.N1 U3.N10 U3.P1 U3.P10 U3.R2 U3.R5 U3.R6 U3.R9 U4.4 U5.7 U6.7 U7.7 U8.2 U9.4 U10.A1 U10.A8 U10.A10 U10.A13 U10.A16 U10.B8 U10.B10 U10.B14(VSSSD#B14) U10.C3 U10.C6 U10.C9 U10.C10 U10.D3 U10.D8 U10.D14 U10.E7 U10.E8 U10.F3 U10.F12 U10.G1 U10.G2 U10.G5 U10.G8 U10.H8 U10.H9 U10.J3 U10.J7 U10.J8 U10.J9 U10.J14 U10.L13 U10.M5 U10.N7 U10.P13 U10.T1 U10.T16 U11.3 U11.4 U11.8 U11.12 U11.13 U11.14 U11.15 U11.16 U11.17 U11.19 U11.20 U11.23 U11.EPAD U12.7 U13.2 Y1.2 Y2.2 Y3.2
P1V0: C30.1 C77.2 C80.1 C81.1 C82.1 C88.2 C91.2 C100.1 C102.1 C103.1 C108.1 C110.2 C111.2 C112.1 L4.2 R53.2 U10.A2 U10.B15 U10.C4 U10.C5 U10.C7 U10.D7 U10.D9 U10.H7 U10.J10 U10.K9
P1V2: C4.2 C16.2 C22.1 C29.1 C31.1 C32.2 C33.2 C34.2 C36.2 C38.2 C39.2 C43.2 C44.2 C45.2 C49.2 C50.2 C51.2 C52.2 C57.2 C61.2 C68.1 C71.2 C73.2 C78.2 L3.2 R25.1 R37.1 R52.2 U3.B5 U3.C7 U3.C10 U3.D2 U3.D5 U3.E9 U3.F1 U3.F10 U3.G1 U3.H1 U3.H6 U3.J6 U3.J7 U3.K6 U3.M10 U3.N2 U3.N9 U3.P2 U3.P5 U3.R7 U3.R10 U3.T5 U5.1 U5.8 U6.1 U6.8 U7.1 U7.8 U10.N5 U10.N6 U10.P12 U12.1 U12.8
P1V5: C12.1 C13.1 J9.10 U8.5(OUT)
P1V5_MIPI: C64.1 C65.2 J8.10 U13.5(OUT)
P1V8: C1.2 C2.2 C5.1 C7.2 C11.1 C14.1 C17.1 C18.1 C24.2 C26.1 C27.2 C35.2 C41.2 C46.2 C48.2 C58.1 C60.2 C62.2 C63.2 C69.2 C70.1 C72.1 C74.1 C75.2 C76.2 C79.2 C83.2 C84.2 C86.2 C87.2 C89.2 C90.2 C92.2 C93.2 C98.2 C99.2 C101.2 C104.2 C105.2 C106.2 C107.2 C109.2 C113.2 J2.1(UV_UART_TXD) J2.2 J2.3 J5.8 J8.11 J9.11 L2.2 R3.1 R4.1 R7.1 R8.1 R16.2 R27.1 R30.2 R32.1 R34.1 R39.1 R42.1 R44.2 R50.2 R54.2 R58.1 R59.1 R60.1 R61.1 U1.8 U3.B6 U3.C1 U3.R1 U3.T6 U5.14(VCCB) U6.14(VCCB) U7.14(VCCB) U8.1 U8.3 U9.8 U10.B11 U10.B13 U10.C8 U10.D13 U10.E3 U10.F5 U10.F7 U10.F8 U10.F13 U10.G7 U10.J4 U10.J13 U10.K8 U10.K10 U10.L14 U10.M6 U12.14(VCCB) U13.1 U13.3 Y1.4(VCC) Y2.4(VCC) Y3.4(VCC)
P2V8: C6.1 C10.1 C21.2 C42.2 D1.2 D2.2 D5.2 FB1.1 FB2.1 FB3.1 FB4.1 L1.2 R29.2
P5V0: C15.1 C19.1 C20.1 C47.2 C53.2 C54.2 C55.2 C56.2 C66.2 C67.2 C85.2 C94.2 C95.2 C96.2 C97.2 J3.1 J3.2 J3.3 J3.4 J3.5 J3.6 J3.19 J3.20 J3.21 J3.22 J3.23 J3.24 J6.1 J6.2 J6.3(VBAT+#3) R1.2 R2.2 R10.1 R11.2 R13.1 R17.2 R18.2 R22.1 R23.2 U2.5 U2.6 U2.10 U2.21 U4.1 U4.2 U11.5 U11.6 U11.10 U11.21
A0: U3.P3 U10.M4
A1: U3.N3 U10.N3
A2: U3.M3 U10.N4
A3: U3.M2 U10.M7
A4: U3.M1 U10.P5
A5: U3.G2 U10.N10
A6: U3.F2 U10.N12
A7: U3.F3 U10.N11
A8: U3.E3 U10.N14
A9: U3.E2 U10.N13
BT1120_CLK: J1.12 U10.E10
BT1120_D0: J1.4 U10.G9
BT1120_D1: J1.5 U10.G10
BT1120_D2: J1.6 U10.H10
BT1120_D3: J1.7 U10.J15
BT1120_D4: J1.8 U10.J16
BT1120_D5: J1.9 U10.G11
BT1120_D6: J1.10 U10.G12
BT1120_D7: J1.11 U10.F10
CKE: U3.K1 U10.M8
CKN: U3.H3 U10.N9
CKP: U3.J3 U10.N8
CS: U3.L1 U10.L7
CS_B: R27.2 U1.1 U5.12
DM0: U3.K5 U10.R8
DM1: U3.H5 U10.M9
DNU.A1: U3.A1
DNU.A2: U3.A2
DNU.A9: U3.A9
DNU.A10: U3.A10
DNU.B1: U3.B1
DNU.B10: U3.B10
DNU.T1: U3.T1
DNU.T10: U3.T10
DNU.U1: U3.U1
DNU.U2: U3.U2
DNU.U9: U3.U9
DNU.U10: U3.U10
DONE: U10.B16
DPU_RX: J4.1 U12.13
DPU_TX: J4.2 U12.11
DPU_UART_RX: U10.M13 U12.2
DPU_UART_TX: U10.L10 U12.4
DQ0: U3.N8 U10.R5
DQ1: U3.M8 U10.R6
DQ2: U3.M7 U10.P11
DQ3: U3.M9 U10.P4
DQ4: U3.M6 U10.R7
DQ5: U3.L7 U10.P8
DQ6: U3.L8 U10.R14
DQ7: U3.L9 U10.R15
DQ8: U3.G9 U10.P16
DQ9: U3.G8 U10.R3
DQ10: U3.G7 U10.R4
DQ11: U3.F6 U10.R11
DQ12: U3.F9 U10.R2
DQ13: U3.F7 U10.R13
DQ14: U3.F8 U10.P14
DQ15: U3.E8 U10.P15
DQS0N: U3.L5 U10.P7
DQS0P: U3.L6 U10.P6
DQS1N: U3.G5 U10.R10
DQS1P: U3.G6 U10.P10
DVP_D0: J9.19 U10.G14
DVP_D1: J9.21 U10.E15
DVP_D2: J9.22 U10.E13
DVP_D3: J9.20 U10.F15
DVP_D4: J9.18 U10.G15
DVP_D5: J9.16 U10.H15
DVP_D6: J9.14 U10.G13
DVP_D7: J9.12 U10.H13
DVP_HSYNC: J9.9 U10.H12
DVP_MCLK: J9.13 R45.2
DVP_PCLK: J9.17 U10.H14
DVP_PWDN: J9.8 U10.J12
DVP_RST: J9.6 U10.K12
DVP_SCL: J9.5 R7.2 U10.K11
DVP_SDA: J9.3 R8.2 U10.H11
DVP_VSYNC: J9.7(VSYNC) U10.J11
EIO1: J4.7 U10.J1
EIO2: J4.8 U10.H1
EIO3: J4.17 U10.H2
EIO4: J4.9 U10.H3
EIO5: J4.24 U12.12
EIO5_BUF: U10.L11 U12.3
EIO6: J4.23 U12.10
EIO6_BUF: U10.L9 U12.5
EIO7: J4.18 U10.J2
FPGA_UART_RX: U10.M10
FPGA_UART_TX: U10.N15
HOLD: U10.P9
IAM_ALIVE: J4.15 U10.C13
INIT_N: U10.D11
IO-0: U6.2 U10.T2
IO-0_B: J2.14 U6.13
IO-1: U6.3 U10.T3
IO-1_B: J2.13 U6.12
IO-2: U6.4 U10.T4
IO-2_B: J2.12 U6.11
IO-3: U6.5 U10.T5
IO-3_B: J2.11 U6.10
IO-4: U7.2 U10.T6
IO-4_B: J2.10 U7.13
IO-5: U7.3 U10.T7
IO-5_B: J2.9 U7.12
IO-6: U7.4 U10.T8
IO-6_B: J2.8 U7.11
IO-7: U7.5 U10.T9
IO-7_B: J2.7 U7.10
IO-8: U10.M14
IO-10: U10.N16
IO_LED_1: R36.1 U10.T10
IO_LED_2: R41.1 U10.T11
IO_LED_3: R51.1 U10.R16
IO_P5V0_SHDN: J4.10 U10.E12
IR_5V0: C3.2 J7.1 J7.2 J7.3(VDD50#3) U4.5(VOUT)
IR_D0: J7.13 U10.K5
IR_D1: J7.14 U10.L4
IR_D2: J7.15 U10.K4
IR_D3: J7.16 U10.L3
IR_D4: J7.17 U10.K3
IR_D5: J7.18 U10.J5
IR_D6: J7.19 U10.G3
IR_D7: J7.20 U10.J6
IR_D8: J7.21 U10.H5
IR_D9: J7.22 U10.H6
IR_D10: J7.23 U10.F4
IR_D11: J7.24 U10.G4
IR_D12: J7.25 U10.E4
IR_D13: J7.26 U10.E6
IR_HSYNC: J7.28 U10.F6
IR_PCLK: J7.29 U10.D6
IR_PWR_EN: R12.2 U4.3 U10.M3
IR_UART_RX: J7.6 TP1.1(TP) U10.L5
IR_UART_TX: J7.7 TP2.1(TP) U10.K6
IR_VSYNC: J7.27 U10.E5
JTAG_EN: J5.6 R57.2 R61.2 U10.D10
LD_PWR_EN: J4.16 U10.H4
MCLK: R19.1 U10.C16
MCSN: R54.1 U9.1 U10.C15
MD0: U9.5 U10.C14
MD1: U9.2 U10.D16
MD2: U9.3(W#/SIO2) U10.D15
MD3: U9.7 U10.D12
MIPI1_CLK+: J7.31 U10.D1
MIPI1_CLK-: J7.32 U10.D2
MIPI1_D0+: J7.34 U10.E1
MIPI1_D0-: J7.35 U10.E2
MIPI1_D1+: J7.37 U10.C1
MIPI1_D1-: J7.38 U10.C2
MIPI2_CLK+: J8.16 U10.A5
MIPI2_CLK-: J8.18 U10.B5
MIPI2_D0+: J8.20 U10.A4
MIPI2_D0-: J8.22 U10.B4
MIPI2_D1+: J8.12 U10.A6
MIPI2_D1-: J8.14 U10.B6
MIPI_MCLK: J8.13 R46.2
MIPI_PWDN: D4.1(K) U10.P1
MIPI_PWRDN: D4.2 J8.8 R42.2
MIPI_RESET: D3.2 J8.6 R39.2
MIPI_RST: D3.1(K) U10.P2
MIPI_SCL: J8.5 R3.2 U10.G16
MIPI_SDA: J8.3 R4.2 U10.H16
NC.B2: U3.B2
NC.B3: U3.B3
NC.B7: U3.B7
NC.B8: U3.B8
NC.B9: U3.B9
NC.C8: U3.C8
NC.D6: U3.D6
NC.D7: U3.D7
NC.D8: U3.D8
NC.D9: U3.D9
NC.E5: U3.E5
NC.E6: U3.E6
NC.E7: U3.E7
NC.J2: U3.J2
NC.N5: U3.N5
NC.N6: U3.N6
NC.N7: U3.N7
NC.P6: U3.P6
NC.P7: U3.P7
NC.P8: U3.P8
NC.P9: U3.P9
NC.R3: U3.R3
NC.R8: U3.R8
NC.T2: U3.T2
NC.T3: U3.T3
NC.T7: U3.T7
NC.T8: U3.T8
NC.T9: U3.T9
P5033: J4.11 J4.12
PROGRAM_N: J5.2 U10.C12
RFU.C3: U3.C3
RFU.K2: U3.K2
RFU.K3: U3.K3
RFU.L2: U3.L2
RFU.L3: U3.L3
SCK_B: U1.6 U5.10
SI_B: U1.5 U5.11
SO_B: U1.2 U5.13
SPI1_MISO: J4.20 U10.K2
SPI1_MOSI: J4.22 U10.N2
SPI1_NSS: J4.19 U10.L1
SPI1_SCK: J4.21 U10.N1
SPI2_MISO: J4.5 U10.L2
SPI2_MOSI: J4.3 U10.M2
SPI2_NSS: J4.6 U10.K1
SPI2_SCK: J4.4 U10.M1
SPI_CS: U5.3 U10.T13
SPI_SCK: U5.5 U10.T15
SPI_SI: U5.4 U10.T14
SPI_SO: U5.2 U10.T12
SYNC-1: R9.1 R10.2 U2.11(SYNC)
SYNC-2: R21.1 R22.2 U11.11(SYNC)
SYNC_O: J1.13 U10.E9
SYS_CLK: R20.2 U10.D4
TCK: J5.3 R55.1 U10.F14
TDI: J5.5 R60.2 U10.F11
TDO: J5.1 R58.2 U10.E14
TMS: J5.4 R59.2 U10.E11
UV_PWR_EN: J6.7 R13.2 R14.1 U10.E16
UV_UART_RXD: J1.2 U10.F9
UV_UART_TXD: J1.1(UV_UART_TXD) U10.G6
VREF_CA: C59.2 C61.1 R37.2 R38.1 U3.G3
VREF_DQ: C36.1 C37.2 R25.2 R26.1 U3.J9
WP: U10.M15
N760129: C8.2 FB1.2 J9.4
N760503: C25.2 FB3.2 J9.23
N762812: R43.1 R44.1 Y2.1
N763219: R45.1 Y2.3
N848963: U10.R1
N849057: U10.L8
N900708: R19.2 U9.6
N990170: R15.1 R16.1 Y1.1
N990230: R20.1 Y1.3
N1026841: R24.1 R32.2 U1.3(W\P\)
N1026851: R33.1 R34.2 U1.7
N1052103: C23.2 FB2.2 J8.23
N1052756: C40.2 FB4.2 J8.4
N1560231: R5.2 U4.6
N1593173: D1.1(CATHODE) R35.2
N1593177: D2.1(CATHODE) R40.2
N1593181: D5.1(CATHODE) R47.2
N1593233: Q1.3 R35.1
N1593237: Q2.3 R40.1
N1593241: Q3.3 R47.1
N1593321: Q1.1 R36.2
N1593325: Q2.1 R41.2
N1593329: Q3.1 R51.2
N1599549: L1.1 U2.9
N1609517: C9.2 R11.1 U2.18
N1613601: C42.1 R28.2 R29.1 U2.7
N1616720: L2.1 U2.22
N1616768: C41.1 R30.1 R31.2 U2.24
N1627713: R1.1 U2.2
N1630418: R2.1 U2.1
N2008548: R6.1 U3.D3(ZQ)
N2071731: L3.1 U11.9
N2071767: R18.1 U11.2
N2071821: C78.1 R48.2 R52.1 U11.7
N2072037: C28.2 R23.1 U11.18
N2072149: L4.1 U11.22
N2072181: R17.1 U11.1
N2072229: C77.1 R49.2 R53.1 U11.24
N2253131: R50.1 R56.1 Y3.1
N2266172: R46.1 Y3.3

Pads without a net: J7 8 9 10 11; J8 1 7 9 17 19 21; J9 1; U5 6 9; U6 6 9; U7 6 9; U8 4; U10 A3 A7 A9 A11 A12 A14 A15 B1 B2 B3 B7 B9 B12 C11 D5 F1 F2 F16 K7 K13 K14 K15 K16 L6 L12 L15 L16 M11 M12 M16 P3 R9 R12; U12 6 9; U13 4

## Via types
v1: diameter 0.3, hole 0.15, TOP to BOTTOM, 385 vias
v2: diameter 0.4, hole 0.2, TOP to BOTTOM, 234 vias

## Routing (per net, layer and track width the routed paths; a pad name or vN(x,y) marks a point on that pad's centre or on a via; arc(x,y) is an arc through that point)
GND: length 416.5
  TOP w0.2: v1(56.41,21.89) 56.41,21.56 56.31,21.46 54.88,21.46 U3.M5 ; C15.2 77.39,15.35 77.67,15.63 77.96,15.63 78.7,14.89 79.63,14.89 79.7,14.82 ; U3.H2 U3.J1 52.19,19.07 52.46,18.8 54.96,18.8 55.11,18.95 v1(55.11,19.28)
  TOP w0.25: U3.R2 56.4,19.93 v1(56.41,19.93) ; U3.N10 v1(54.78,25.9) ; U3.F5 v1(49.88,21.85) ; U3.P1 v1(55.77,19.27) ; U3.R9 v1(56.4,25.12) ; v1(55.11,19.28) 55.1,19.28 U3.N1 ; U3.D1 v1(49.25,19.28) ; v1(56.41,21.89) 56.4,21.89 56.39,21.9 56.38,21.9 U3.R5 ; U3.D10 v1(48.94,25.9) ; U3.P10 v1(55.44,25.9) ; U3.J8 v1(52.5,24.47) ; U3.C9 v1(48.6,25.12) ; U3.J5 v1(51.84,21.86) ; U3.E10 v1(49.59,25.9) ; v1(47.97,22.53) U3.C6 ; U3.L10 v1(53.48,25.9) ; U3.G10 v1(50.88,25.9) ; U3.E1 v1(49.9,19.28) ; U3.R6 v1(56.4,22.53) ; U3.C5 v1(47.97,21.88) ; U3.C2 v1(47.95,20.58)
  TOP w0.3: U10.C6 v1(53.8,5.7) ; U10.G1 v1(58.6,8.1) 59.7,9.2 C23.1 ; U10.C10 v1(51.4,4.9) ; v2(66.34,14.02) 65.7,14.02 65.55,14.17 U6.7 ; v2(35.85,5.35) 36.31,5.81 J5.7 ; U10.A1 v1(58.65,3.25) ; U10.D8 v1(53,6.5) ; C2.1 61.1,23.8 61.3,24 61.3,25.3 61.47,25.47 v2(61.9,25.47) ; U1.4 43.05,27.3 42.7,27.65 v2(41.8,27.65) ; U10.J8 v1(53,10.5) ; U10.A16 46.2,3.25 46.55,2.9 48.2,2.9 48.5,3.2 48.5,3.2 48.6,3.3 U10.A13 v1(49,4.1) ; U10.G2 v1(57.8,8.1) ; U10.N7 v1(53.8,13.7) ; C31.2 64.58,3.1 64.51,3.17 v2(64.51,3.55) ; U10.H9 v1(52.2,9.7) ; U10.D3 v1(56.99,5.7) 56.99,5.7 U10.C3 ; U10.M5 v1(55.4,12.1) ; U10.A8 v1(52.2,4.1) ; U10.F12 v1(49,7.3) ; C7.1 59.08,21.13 59.35,21.4 59.95,21.4 60.1,21.55 C4.1 ; U10.J14 v1(47.4,10.5) ; J5.9 41.08,5.2 41.23,5.35 v2(41.75,5.35) ; U10.J9 v1(51.4,9.7) ; U10.C9 v1(52.2,5.7) ; v1(46.6,15.3) U10.T16 45.92,15.98 44.57,15.98 44.15,16.4 43.17,16.4 43.05,16.28 U5.7 ; U10.B8 v1(53,4.1) ; U10.J7 v1(53.8,10.5) ; v2(72.8,4.5) 72.25,4.5 71.8,4.05 U12.7 ; U10.E7 v1(53.8,6.5) ; U10.A10 v1(50.6,4.1) ; U10.B10 v1(51.4,4.1) ; U10.F3 v1(57,8.1) ; U10.D14 v1(47.4,6.5) ; U10.L13 v1(48.2,12.1) ; U10.B14 v1(47.4,4.1) ; U10.T1 v1(58.6,15.3) ; U10.G8 v1(53,8.9) ; v2(71.8,13.72) U7.7 ; U10.J3 v1(57,9.7) ; U10.G5 v1(54.6,8.1) ; U10.H8 v1(53,9.7) ; U10.E8 v1(53,7.3) ; U10.P13 v1(48.2,14.5)
  TOP w0.4: U4.4 78.9,20.29 79.39,19.8 v2(80.15,19.8) ; v2(26.81,13.75) 26.86,13.8 C21.1 ; v2(32.8,4) 32.9,4 33.18,4.28 J5.10 35.41,4.28 35.85,4.72 v2(35.85,5.35) ; v2(74.73,26.7) J2.16 v2(73.07,26.7) ; v2(66.72,8.16) 66.31,7.75 C26.2 ; C1.1 v2(76.65,23.64) 76.65,23.48 76.64,23.48 R5.1 77.52,23 77.62,22.9 C3.1 v2(78.1,23.77) ; v2(18.61,13.4) 17.38,13.4 17.18,13.6 R14.2 ; C5.2 37.65,22.97 38,23.32 J1.3 v2(38,25.23) ; v2(41.1,26.75) 41.05,26.7 J1.16 v2(39.57,26.7) ; J2.4 v2(70.7,25.66) ; R15.2 v2(64.02,12.9) v2(63.39,12.9) ; Y1.2 63.15,12.28 63.39,12.52 v2(63.39,12.9) ; C18.2 31.52,14.75 31.57,14.7 C17.2 v2(32.98,14.7) ; R21.2 v2(15.2,2.4) ; C27.1 29.8,7.3 29.59,7.09 29.59,6.77 v2(29.57,6.75) ; C24.1 30.67,8.67 v2(29.63,8.67) ; v2(33.73,20.55) C6.2 32.42,20.55 32.27,20.4 C8.1 31.61,20.01 32.2,19.41 C13.2 C12.2 ; R12.1 79.7,13.58 v2(80.68,12.6) ; C25.1 v2(28.13,8.05) ; v2(63.39,12.9) C22.2 ; J2.5 v2(69.9,25.23) ; C2.1 C4.1 ; v2(61.9,25.47) J2.15 v2(62.73,26.7) ; J1.15 v2(29.23,26.7) ; C14.2 v2(26.22,16) ; U9.4 v2(40.17,12.86) ; C16.1 v2(36.92,15.1) ; U8.2 v2(34.9,15.47) ; v2(44.45,22.85) 44.71,22.59 R6.2 ; J2.6 v2(69.1,25.67) ; R9.2 v2(15.2,18.05) ; J1.14 v2(29.2,25.23)
  TOP w0.66: J3.18 8.42,14.38 9.4,13.4 C19.2 C20.2
  GND-2 w0.2: v1(51.4,9.7) 50.6,8.9 ; 50.6,8.9 v1(49,7.3) ; 50.6,8.9 52.2,7.3 v1(53,7.3) ; v1(55.4,12.1) 55,11.7 55,10.05 54.8,9.85 54.45,9.85 v1(53.8,10.5) ; v1(47.4,6.5) 47.4,5.65 48,5.05 48,4.7 v1(47.4,4.1) ; v1(54.6,8.1) U10.G5 56.6,8.5 v1(57,8.1) ; v1(48.2,14.5) 47.8,14.9 46.85,14.9 46.6,15.15 v1(46.6,15.3) 46.6,15.9 46.85,16.15 50.9,16.15 51.35,15.7 51.35,14.35 51.55,14.15 52.55,14.15 53,13.7 v1(53.8,13.7)
  GND-2 w0.3: v1(48.94,25.9) 48.94,25.48 48.9,25.44 48.9,25.4 48.62,25.12 v1(48.6,25.12) ; v1(48.94,25.9) v1(49.59,25.9) ; v1(48.94,25.9) 48.94,26.75 ; 55.44,26.75 v1(55.44,25.9) v1(54.78,25.9) ; 55.44,26.75 53.7,26.75 53.48,26.54 v1(53.48,25.9) 53.38,25.8 53,25.8 52.8,25.6 52.8,24.8 52.5,24.5 v1(52.5,24.47) ; 55.44,26.75 56.65,26.75 56.98,26.41 56.98,25.7 v1(56.4,25.12) ; 47.95,21.44 47.41,20.9 46.55,20.9 45.91,20.26 45.91,19.84 46.47,19.28 v1(49.25,19.28) v1(49.9,19.28) ; 47.95,21.44 v1(47.95,20.58) ; 47.95,21.44 47.97,21.45 v1(47.97,21.88) v1(47.97,22.53) 48.77,22.53 49.46,21.85 v1(49.88,21.85) ; 56.41,21.2 52.07,21.2 51.84,21.43 v1(51.84,21.86) ; 56.41,21.2 v1(56.41,19.93) 57.22,19.93 57.43,19.72 57.43,18.83 57.2,18.6 55.3,18.6 55.15,18.75 55.15,18.82 55.11,18.85 v1(55.11,19.28) 55.75,19.28 v1(55.77,19.27) ; 56.41,21.2 56.41,21.46 56.41,21.46 v1(56.41,21.89) 56.4,21.9 v1(56.4,22.53) ; v1(51.4,4.1) v1(52.2,4.1) v1(53,4.1) ; v1(51.4,4.1) v1(50.6,4.1) ; v1(51.4,4.1) v1(51.4,4.9) 51.83,4.9 52.2,5.27 v1(52.2,5.7) v1(53,6.5) ; v2(44.45,22.85) 44.45,22.3 43.48,21.33 43.48,20.51 v2(43.88,20.11) ; v1(49,4.1) 49,3.54 48.7,3.24 47.7,3.24 47.4,3.54 v1(47.4,4.1) ; v1(53,6.5) v1(53,7.3) ; v1(53,6.5) v1(53.8,6.5) v1(53.8,5.7) ; v1(53,9.7) v1(52.2,9.7) v1(51.4,9.7) ; v1(53,9.7) v1(53,8.9) ; v1(53,9.7) v1(53,10.5) v1(53.8,10.5) ; v2(61.9,25.47) 62.39,25.96 62.39,26.36 v2(62.73,26.7) ; v1(50.88,25.9) 50.88,26.45 50.59,26.75 48.94,26.75 ; 48.94,26.75 48.78,26.9 v2(46.45,26.9) 46.04,27.31 45.94,27.31 v2(45.6,27.65) ; v1(47.4,10.5) 47.4,10.95 47.7,11.25 47.9,11.25 48.2,11.55 v1(48.2,12.1) ; v1(57,8.1) v1(57.8,8.1) v1(58.6,8.1)
  SIG-3 w0.3: v1(57,8.1) v1(57.8,8.1) v1(58.6,8.1) ; v2(61.1,7.3) 60.37,6.57 58.4,6.57 57.54,5.7 v1(56.99,5.7)
  GND-5 w0.102: 49.83,8.14 49.84,8.14
  GND-5 w0.2: 49.84,8.14 50.62,8.92 ; 50.62,8.92 v1(51.4,9.7) ; 50.62,8.92 52.24,7.3
  GND-7 w0.102: 49.79,8.09 49.79,8.09
  GND-7 w0.2: 52.22,7.28 50.62,8.88 50.62,8.92 ; 49.79,8.09 50.62,8.92 ; 50.62,8.92 v1(51.4,9.7)
  BOTTOM w0.102: 19.3,17.95 v2(19.33,17.98)
  BOTTOM w0.16: 51.8,9.83 51.8,8.6 C88.1
  BOTTOM w0.2: C71.1 C50.1 56.13,22.8 v1(56.4,22.53) ; C84.1 56.91,9.61 v1(57,9.7) 56.91,9.79 C83.1 ; C33.1 49.6,25.92 v1(49.59,25.9) ; R26.2 51.28,26.3 v1(50.88,25.9) 51.09,25.7 C37.1 ; C45.1 51.25,24.38 51.34,24.47 v1(52.5,24.47) 52.5,24.46 C44.1 ; C98.1 v1(53.8,6.5) ; v1(53.8,10.5) 53.8,10.37 C80.2 ; C51.1 51.85,21.87 v1(51.84,21.86) ; v1(48.94,25.9) 48.9,25.94 C34.1 ; C76.1 47.5,10.6 v1(47.4,10.5) 47.5,10.4 C79.1 ; C48.1 48.2,23.85 48.6,24.25 v1(48.6,25.12) 48.69,25.2 C38.1 ; C110.1 v1(58.65,3.25) C111.1 ; C32.1 55.5,25.97 v1(55.44,25.9) ; C106.1 49.1,4.2 v1(49,4.1) ; R38.2 48.08,20.71 v1(47.95,20.58) 47.84,20.7 C59.1 47.1,20.7 47,20.6 C63.1 ; C112.2 46.38,2.56 46.62,2.8 C113.1 47.1,3.1 47.5,3.5 C107.1 47.5,4 v1(47.4,4.1) ; C74.2 48.14,12.04 v1(48.2,12.1) ; C43.1 56.2,24.65 56,24.85 C39.1 56.38,25.1 v1(56.4,25.12) ; v1(52.2,9.7) 52.09,9.81 C81.2 C82.2 51.51,9.81 v1(51.4,9.7) ; v1(47.4,6.5) 47.22,6.32 C101.1 C104.1 ; C86.1 52.9,8.8 v1(53,8.9) ; C52.1 48.9,22.5 48.8,22.6 C49.1 48.03,22.6 v1(47.97,22.53) ; C89.1 v1(54.6,8.1) ; C57.1 59.15,21.1 58.8,20.75 57.61,20.75 56.79,19.93 v1(56.41,19.93) ; C93.1 48.9,7.2 v1(49,7.3) 48.9,7.4 C90.1 ; C73.1 v1(55.4,12.1) ; C75.1 v1(53,10.5) ; v1(53,6.5) 52.87,6.63 C100.2 52.88,6.73 C91.1 v1(53,7.3)
  BOTTOM w0.25: v2(80.15,19.8) J7.4 77.75,19.8 77.45,19.5 J7.5 ; v1(57.8,8.1) 58.1,7.8 ; 58.1,7.8 58.3,7.8 v1(58.6,8.1) ; 58.1,7.8 C99.1 ; v1(56.99,5.7) 56.8,5.9 C102.2 ; v1(53,4.1) 52.8,4.3 C105.1 ; v1(57,8.1) 57.1,8 C92.1 ; C103.2 v1(52.2,5.7)
  BOTTOM w0.3: J7.39 75.8,9.3 75.5,9.6 ; R55.2 37.3,7.75 36.3,6.75 36.3,5.8 v2(35.85,5.35) ; 75.5,8 75.8,8.3 J7.41 ; 75.5,8 75.5,6.69 ; 75.5,8 75.5,9.6 ; C57.1 62.5,21.8 63.29,21.01 63.29,20.59 63,20.3 62.98,20.3 62.93,20.25 J8.2 ; J7.12 v2(80.3,17.4) ; J9.24 29.05,9.25 v2(29.63,8.67) ; 75.5,9.6 75.5,10.78 75.82,11.1 J7.33 ; J7.30 80.08,12 v2(80.68,12.6) ; C62.1 72.1,19.62 72.24,19.48 72.24,18.23 72.67,17.8 U13.2 ; 75.5,6.69 75.79,6.4 v1(75.79,5.97) ; 75.5,6.69 75.49,6.7 74,6.7 73.6,7.1 R56.2 ; J8.24 61.25,9.25 61.1,9.1 v2(61.1,7.3) ; v2(71.8,13.72) 71.8,14.25 71.05,15 C68.2 ; v2(44.45,22.85) 45.05,23.45 R33.2 ; v2(64.02,12.9) 64,12.9 63.7,13.2 ; J8.15 63.15,13.75 63.7,13.2 ; v2(66.34,14.02) 66.76,13.6 C72.2 ; v2(33.73,20.55) 29.35,20.55 29.05,20.25 J9.2 ; v1(56.4,25.12) 57.28,25.12 58.1,24.3 C46.1 ; 63.7,13.2 v2(63.39,12.9) ; 41.07,10.21 40.69,10.21 39.7,11.2 39.7,12.76 39.8,12.86 v2(40.17,12.86) ; J7.36 v2(78.57,10.2) ; J9.15 v2(26.81,13.75)
  BOTTOM w0.4: J6.5 13,17.4 12.33,18.07 v2(10.85,18.07) ; 75.96,22.95 76.2,22.71 76.2,21.9 76.4,21.7 J7.40 ; 75.96,22.95 v2(76.65,23.64) ; 75.96,22.95 74.65,22.95 74.2,22.5 C58.2 ; C109.1 v2(41.75,5.35) ; v2(71.14,22.42) 70.19,22.42 70,22.23 C60.1 ; R43.2 19.3,17.95 ; v2(40.17,12.86) 40.17,15.17 41.81,16.81 Q2.2 ; v2(17.4,9.65) 17.4,8.9 17.2,8.7 C85.1 ; v2(20.55,25.6) R31.1 v2(21.4,26.65) ; v2(5.2,13.8) 5.58,13.8 5.8,14.02 ; v2(10.1,18.05) 10.1,16.72 9.68,16.3 J6.9 ; J9.25 29.72,23.25 29.2,23.77 v2(29.2,25.23) ; v2(29.57,6.75) J9.26 v2(31.5,5.52) ; v2(69.9,25.23) 69.46,25.67 v2(69.1,25.67) ; v2(69.9,25.23) 70.33,25.66 v2(70.7,25.66) ; v2(69.9,25.23) 69.9,24.7 68.45,23.25 J8.25 ; v2(3,13.8) 3.5,14.3 ; 3.5,14.3 C67.1 ; 3.5,14.3 v2(4,13.8) ; v2(6.4,13.8) 6.02,13.8 5.8,14.02 ; C70.2 v2(18.61,13.4) C69.1 ; v2(21.95,17.98) 22.52,17.98 23.15,17.35 Y2.2 ; v2(46.45,26.9) C35.1 v2(45.6,27.65) ; Q1.2 v2(43.88,20.11) ; v2(20.55,10.6) R49.1 v2(21.4,11.65) ; v2(61.9,25.47) 62.17,25.2 C40.1 ; v2(41.8,27.65) R24.2 v2(41.1,26.75) ; v2(14.03,25.6) R28.1 13.4,26.16 v2(13.82,26.58) ; Y3.2 70.57,9.47 70,8.9 C87.1 70,7.05 69.7,6.75 J8.26 65.5,7.83 65.83,8.16 v2(66.72,8.16) ; v2(14.3,10.6) R48.1 13.4,11.18 v2(13.82,11.6) ; C47.1 17.2,23.7 17.42,23.92 v2(17.42,24.53) ; R57.1 v2(32.8,4) ; 5.8,14.02 C66.1 ; v2(67.87,18.75) C64.2 v2(68.5,18.05) C65.1 ; v2(15.2,18.05) 15.2,16.62 15.52,16.3 J6.10 16.2,15.9 15.4,15.1 J6.8
  BOTTOM w0.5: C62.1 71.5,20.3 70.9,20.9 C60.1 ; C108.2 42.34,4.1 42.33,4.11 C109.1
  vias: v2(3,12.5) v2(3,11.2) v2(3,9.9) v2(3,8.7) v2(4,12.5) v2(4,11.2) v2(4,9.9) v2(4,8.7) v2(5.2,12.5) v2(5.2,11.2) v2(5.2,9.9) v2(5.2,8.7) v2(6.4,12.5) v2(6.4,11.2) v2(6.4,9.9) v2(6.4,8.7) v2(7.4,13.8) v2(7.4,12.5) v2(7.4,11.2) v2(7.4,9.9) v2(7.4,8.7) v2(9.08,3.8) v2(9.08,3.05) v2(9.08,2.43) v2(9.33,19.67) v2(9.32,18.95) v2(9.35,18.1) v2(9.8,3.07) v2(9.8,2.43) v2(10.6,2.43) v2(15.46,21.5) v2(15.48,6.53) v2(17.41,22.26) v2(17.5,7.25) v2(18.44,22.45) v2(18.6,7.4) v2(19.33,3.05) v2(19.33,2.42) v2(19.95,17.98) v2(20.2,3.05) v2(20.2,2.43) v2(20.35,18.65) v2(20.65,17.98) v2(21.1,3.05) v2(21.1,2.43) v2(21.3,17.98) v2(22,3.07) v2(22,2.43) v2(85.8,8.65) v2(85.8,7.45) v2(86.5,8.65) v2(86.5,7.45) v2(87.2,8.65) v2(87.2,7.45)
P1V0: length 83.7
  TOP w0.3: U10.C5 v1(55.4,5.7) U10.C4 ; U10.A2 v1(57.85,3.25) ; U10.B15 v1(46.6,4.1) ; U10.H7 v1(53.8,9.7) ; U10.C7 v1(53,5.7) U10.D7 ; U10.J10 v1(51.4,10.5) ; U10.D9 v1(52.2,6.5) ; U10.K9 v1(52.2,10.5)
  VCC-4 w0.102: 50.2,5.41 50.39,5.22 50.48,5.3
  VCC-4 w0.16: 50.56,9.04 50.84,9.33 53.43,9.33 v1(53.8,9.7)
  VCC-4 w0.2: 45.7,5.45 43.75,5.45 42.35,4.05 41.7,4.05 ; 45.7,5.45 46.6,4.55 v1(46.6,4.1) 47.02,4.52 47.77,4.52 47.96,4.71 48.34,4.71 ; 45.7,5.45 47.6,5.45 48.05,5 ; 53.82,4.88 53.45,4.51 50.9,4.51 50.71,4.7 50.2,4.7 ; 53.82,4.88 v1(53,5.7) ; 53.82,4.88 54.58,4.88 v1(55.4,5.7) 55.9,5.7 57.85,3.75 v1(57.85,3.25) ; 48.34,4.71 48.05,5 ; 48.34,4.71 48.55,4.5 50,4.5 50.2,4.7 ; 50.2,6 50.2,5.68 50.08,5.68 49.92,5.52 49.92,5.29 50.2,5.01 50.2,4.7 ; 50.2,6 50.2,6.7 50.4,6.9 ; 50.2,6 49.5,5.3 48.65,5.3 48.35,5 48.05,5 ; v1(53,5.7) v1(52.2,6.5) 51.8,6.9 50.4,6.9 ; v1(53,5.7) 52.6,5.3 50.48,5.3 50.48,5.3 ; v1(53.8,9.7) 53.4,10.1 52.6,10.1 v1(52.2,10.5) v1(51.4,10.5) 50.7,10.5 50.2,10 50.2,9.4 50.56,9.04 50.56,8.76 49.9,8.1 49.9,7.4 50.4,6.9
  VCC-4 w0.3: 41.7,4.05 34.95,4.05 32.5,6.5 30.6,6.5 29.45,5.35 v2(24.75,5.35) v2(24.75,6.1) v2(24.75,6.8) v2(24.75,7.5) v2(24.75,8.2)
  BOTTOM w0.16: C91.2 52.21,7.3 51.65,7.86 C88.2
  BOTTOM w0.2: v1(52.2,6.5) 52.33,6.63 C100.1 52.34,6.73 C91.2 ; v1(53.8,9.7) 53.8,9.82 C80.1 ; v1(57.85,3.25) C111.2 57.98,3.58 58.1,3.7 59.62,3.7 59.74,3.58 C110.2 ; v1(46.6,4.1) 45.9,3.4 C112.1 C108.1 ; v1(52.2,10.5) 52.09,10.39 C81.1 C82.1 51.51,10.39 v1(51.4,10.5)
  BOTTOM w0.25: v1(55.4,5.7) 55.6,5.9 C102.1 ; C103.1 v1(53,5.7)
P1V2: length 241.4
  TOP w0.102: C31.1 v2(66.3,3.83)
  TOP w0.2: 50.89,19.25 50.89,19.04 50.42,18.57 48.93,18.57 48.48,19.02 46.57,19.02 44.79,20.8 43.05,20.8
  TOP w0.25: U3.H6 v1(51.22,23.17) ; U3.H1 51.18,19.25 50.89,19.25 ; U3.D2 v1(48.62,19.93) ; U3.N2 v1(55.1,19.93) ; U3.J6 v1(51.87,23.17) ; U3.N9 v1(55.1,25.12) ; v1(55.76,21.89) 55.76,21.89 55.75,21.89 U3.P5 ; U3.D5 v1(48.62,21.88) ; U3.P2 v1(55.75,19.93) ; U3.F1 50.59,19.25 50.74,19.25 50.74,19.25 50.89,19.25 ; 50.89,19.25 50.88,19.25 U3.G1 ; U3.J7 v1(51.87,23.82) ; U3.C10 v1(48.28,25.9) ; U3.R10 v1(56.09,25.9) ; U3.B5 v1(47.18,22.2) ; U3.M10 v1(54.13,25.9) ; U3.C7 v1(47.97,23.18) ; U3.R7 v1(55.77,23.82) ; U3.K6 v1(52.52,23.17) ; U3.T5 v1(57.19,22.2) ; U3.E9 v1(49.9,25.12) ; U3.F10 v1(50.23,25.9)
  TOP w0.3: U10.N5 v1(54.6,13.7) ; U12.1 67.9,2.92 67.65,2.67 67.24,2.67 66.81,3.1 C31.1 ; U6.8 65.55,20.4 65.7,20.25 66.05,20.25 66.15,20.35 v2(66.15,20.9) ; C22.1 61.6,13.82 61.65,13.87 U6.1 ; 39.15,16.83 37.91,16.83 37.65,16.58 C16.2 ; 39.15,16.83 U5.1 ; 39.15,16.83 39.15,18.6 v2(39.86,19.31) 41.56,19.31 43.05,20.8 U5.8 ; U10.P12 v1(49,14.5) ; U7.8 v1(71.8,21.83) ; U12.8 v2(71.8,8.62) ; v1(57.19,22.2) 58,22.2 58.2,22.4 C4.2 ; U10.N6 v1(54.6,12.9) ; v2(67.3,14.7) 67.3,14.24 67.49,14.05 67.77,14.05 67.9,14.18 U7.1
  TOP w0.4: C22.1 61.12,12.9 60.65,13.37 v2(60.65,13.55)
  VCC-4 w0.2: 47.97,24.2 v1(47.97,23.18) 48.42,23.18 48.62,22.98 v1(48.62,21.88) 48.62,21.31 48.6,21.3 ; 47.97,24.2 48.3,24.2 49.22,25.12 v1(49.9,25.12) ; 47.97,24.2 47.97,25.58 v1(48.28,25.9) ; 56.5,21.2 56.5,20.68 v1(55.75,19.93) v1(55.1,19.93) ; 56.5,21.2 57.19,21.2 ; 56.5,21.2 56.1,21.2 55.76,21.54 ; 31.07,7.7 31.04,7.73 31.04,8.26 30.06,9.24 29.28,9.24 29.23,9.29 29.04,9.1 28.25,9.1 ; 28.25,9.1 29.65,7.7 30.61,7.7 30.93,7.37 31.2,7.37 31.53,7.7 33.1,7.7 34,6.8 41.5,6.8 44.3,9.6 44.3,15.4 45.6,16.7 49.4,16.7 ; 28.25,9.1 26.7,9.1 25.5,10.3 23.5,10.3 22.4,9.2 22.4,5.95 22,5.55 13.15,5.55 12.6,6.1 v2(10.05,6.1) ; 57.19,21.2 57.8,21.2 58.1,20.9 v2(66.15,20.9) ; 57.19,21.2 v1(57.19,22.2) ; v1(49.9,25.12) 49.9,25.4 50,25.5 50.16,25.5 50.23,25.57 v1(50.23,25.9) ; v1(49.9,25.12) 50.62,24.4 51.28,24.4 v1(51.87,23.82) v1(51.87,23.17) ; v1(47.18,22.2) 47.18,21.5 47.38,21.3 41.85,21.3 v2(39.86,19.31) ; v1(51.87,23.17) 51.87,22.78 52.1,22.55 52.85,22.55 53.1,22.3 53.1,21.3 53.25,21.15 55.45,21.15 55.76,21.46 55.76,21.54 ; v1(51.87,23.17) v1(51.22,23.17) ; v1(51.87,23.17) v1(52.52,23.17) ; v1(49,14.5) 49.4,14.9 49.4,16.7 ; 55.76,21.54 v1(55.76,21.89) 55.4,22.25 55.4,22.8 55.77,23.17 v1(55.77,23.82) 55.77,24.46 v1(55.1,25.12) ; 49.4,16.7 49.4,18.2 ; v1(55.1,25.12) 55.68,25.12 56.09,25.52 v1(56.09,25.9) ; v1(55.1,25.12) 54.58,25.12 54.13,25.57 v1(54.13,25.9) ; v1(54.6,12.9) v1(54.6,13.7) 55,14.1 55,16.1 54.4,16.7
  VCC-4 w0.3: 60.65,15.95 60.75,15.85 66.15,15.85 v2(67.3,14.7) ; 60.65,15.95 59.9,16.7 49.4,16.7 ; 60.65,15.95 v2(60.65,13.55) ; v1(71.8,21.83) 71.37,21.4 69.4,21.4 67.9,22.9 67,22.9 66.15,22.05 v2(66.15,20.9) ; v2(10.05,6.1) v2(10.05,6.8) v2(10.05,7.55) 10.05,7.65 v2(10.05,8.27)
  VCC-4 w0.36: 47.38,21.3 48.6,21.3 48.62,21.29 v1(48.62,19.93) 48.62,18.98 49.4,18.2
  VCC-4 w0.4: v2(71.8,8.62) 69.98,6.8 65.4,6.8 64.9,7.3 64.9,9.9 68.1,13.1 68.1,13.9 v2(67.3,14.7)
  BOTTOM w0.2: C36.2 52.9,25.71 R25.1 53.1,26.5 53.86,26.5 54.13,26.23 v1(54.13,25.9) ; C32.2 56.04,25.94 v1(56.09,25.9) ; v1(47.97,23.18) 48,23.14 C49.2 ; C73.2 v1(54.6,12.9) ; v1(52.52,23.17) 52.5,23.18 C44.2 52.13,23.56 v1(51.87,23.82) 51.6,23.56 C45.2 51.25,23.2 v1(51.22,23.17) ; C39.2 55.12,25.1 v1(55.1,25.12) ; v1(48.28,25.9) 48.36,25.97 C34.2 ; v1(55.77,23.82) 55.8,23.86 C43.2 ; C61.2 51.15,20.61 R37.1 55.07,21.2 v1(55.76,21.89) 55.75,21.9 C50.2 C71.2 ; C51.2 51.85,23.15 v1(51.87,23.17) ; v1(48.62,21.88) 48.69,21.96 C52.2 ; v1(50.23,25.9) 50.14,25.99 C33.2 ; C38.2 49.81,25.2 v1(49.9,25.12)
  BOTTOM w0.3: C57.2 57.59,21.8 v1(57.19,22.2)
  BOTTOM w0.4: v2(71.8,8.62) 71.8,4.25 70.95,3.4 68.85,3.4 68.42,3.83 v2(66.3,3.83) ; C68.1 68.13,15 67.83,14.7 v2(67.3,14.7)
P1V5: length 7.7
  TOP w0.4: v2(30.65,17.3) 30.65,18 C12.1 C13.1 33.31,18.05 33.95,18.69 U8.5
  BOTTOM w0.26: J9.10 29.4,16.25 29.85,16.7 30.46,16.7 30.65,16.89 v2(30.65,17.3)
P1V5_MIPI: length 13.9
  BOTTOM w0.28: J8.10 63.15,16.25 64.27,17.37 66.48,17.37 66.76,17.65 66.76,19.32 67.32,19.88 69.15,19.88 69.49,19.54 69.49,19.43 69.5,19.42 C64.1
  BOTTOM w0.4: C65.2 C64.1 U13.5
P1V8: length 367.9
  TOP w0.102: 73.1,24.31 J2.1 ; U10.L14 v1(47.4,12.1)
  TOP w0.18: U3.T6 v1(57.19,22.85) ; U3.C1 v1(47.97,19.92)
  TOP w0.2: R4.1 60.1,24.8 59.9,24.6 59.3,24.6 59.1,24.4 C2.2 58.14,23.8 v1(57.19,22.85) ; U8.1 33.95,17.25 34.3,17.6 35.5,17.6 35.85,17.25 U8.3
  TOP w0.25: U3.R1 v1(56.44,19.24) ; U3.B6 v1(47.18,22.85)
  TOP w0.3: U1.8 44.55,24.9 44.75,25.1 v2(45.4,25.1) ; U6.14 61.65,19.95 61.2,19.5 v2(60.1,19.5) 60.08,19.52 C7.2 ; U10.F5 v1(55.4,7.3) ; U10.D13 v1(48.2,5.7) ; v2(70.92,13.31) 69.45,13.31 68.14,12 R16.2 67,11.33 67.9,10.43 U12.14 ; U10.K10 v1(51.4,11.3) ; U5.14 39.15,20.75 38.75,20.35 37.75,20.35 37.65,20.45 C5.1 ; U10.J13 v1(48.2,10.5) ; U10.J4 v1(56.2,9.7) ; U10.F7 v1(53.8,7.3) ; v2(67.3,20.9) 67.3,20.3 67.38,20.22 67.74,20.22 67.9,20.38 U7.14 ; J5.8 v2(35.81,7.93) ; U10.B13 v1(48.2,4.1) ; U10.F13 v1(48.2,7.3) ; U10.G7 v1(53.8,8.1) ; U10.E3 v1(57.05,6.45) ; U10.C8 v1(52.98,4.93) ; U10.F8 v1(53,8.1) ; U10.B11 v1(49.8,4.1) ; U10.M6 v1(53.8,12.1) ; U10.K8 v1(52.2,11.3)
  TOP w0.4: C14.1 29.35,16 29.6,15.75 v2(29.97,15.75) C18.1 31.4,15.75 31.75,16.1 C17.1 32.83,16.1 33.13,16.4 U8.1 ; v2(73.1,25.23) 73.1,24.31 74.82,24.31 75.22,24.71 75.22,25.36 75.62,25.76 C1.2 ; C26.1 64.75,8.25 65.15,8.65 Y1.4 66.71,9.29 67.37,8.62 v2(67.9,8.62) U12.14 ; C27.2 C24.2 32.15,8.7 32.5,9.05 v2(32.95,9.05) U9.8 ; R3.1 v2(60.1,26.13) R4.1 ; R7.1 v2(28.38,21.7) R8.1 ; J2.2 v2(72.3,25.68) ; J2.3 v2(71.5,25.23) ; C5.1 v2(38.45,21.05)
  SIG-3 w0.2: v1(52.98,4.93) 52.23,4.93 51.85,5.3 50.2,5.3 49.42,6.07 48.58,6.07 v1(48.2,5.7)
  SIG-3 w0.3: v1(48.2,5.7) v1(48.2,4.1) 48.2,3.7 48.4,3.5 49.2,3.5 v1(49.8,4.1)
  SIG-3 w0.4: 34.5,6.62 35.22,6.62 35.81,7.21 v2(35.81,7.93) ; 34.5,6.62 34.5,4.9 35.9,3.5 42.1,3.5 43.9,5.3 46.1,5.3 46.5,5.7 v1(48.2,5.7) ; 34.5,6.62 v2(34.5,7.6) ; v2(40.85,24.8) 40.85,25.25 41.45,25.85 44.65,25.85 v2(45.4,25.1) 46,25.1 48,27.1 56.65,27.1 57.62,26.13 v2(60.1,26.13)
  VCC-4 w0.2: 41.9,17.6 41.9,11.7 39.8,9.6 37.48,9.6 v2(35.81,7.93) ; 41.9,17.6 45.65,17.6 v1(47.97,19.92) ; 41.9,17.6 39.7,17.6 38.9,18.4 38.9,21.05 ; v1(55.4,7.3) U10.F5 54.2,7.7 v1(53.8,7.3) v1(53.8,8.1) v1(53,8.1) ; v1(55.4,7.3) 55.8,7.7 55.8,9.3 v1(56.2,9.7) 56.2,10.3 56.6,10.7 56.6,11.5 56.4,11.7 53.4,11.7 ; v1(55.4,7.3) 55.8,6.9 U10.E3 v1(57.05,6.45) ; 38.9,21.05 v2(38.45,21.05) ; 38.9,21.05 38.9,23 40.17,24.27 40.85,24.27 ; v1(47.18,22.85) 45.77,24.27 45.4,24.27 ; v1(48.2,5.7) U10.D13 48.6,6.9 v1(48.2,7.3) 47.8,7.7 47.8,10.1 v1(48.2,10.5) 48.2,11.3 ; 48.2,11.3 48.6,11.7 51,11.7 v1(51.4,11.3) v1(52.2,11.3) 52.6,11.7 53.4,11.7 ; 48.2,11.3 47.6,11.3 47.4,11.5 v1(47.4,12.1) ; 45.4,24.27 40.85,24.27 ; 45.4,24.27 v2(45.4,25.1) ; 40.85,24.27 v2(40.85,24.8) ; 53.4,11.7 v1(53.8,12.1)
  VCC-4 w0.3: 73.1,23.8 v2(73.1,25.23) 72.65,25.68 v2(72.3,25.68) 71.95,25.68 v2(71.5,25.23) ; 73.1,23.8 73.1,21.7 71.5,20.1 ; 73.1,23.8 69.9,23.8 69.4,24.3 65.5,24.3 65.06,23.86 60.1,23.86 ; v2(60.1,26.13) 60.1,23.86 ; 60.1,23.86 58.2,23.86 v1(57.19,22.85) ; v2(24.75,21.85) v2(24.75,21.15) v2(24.75,20.45) 24.75,19.3 ; v2(24.75,21.85) v2(24.75,22.55) v2(24.75,23.22) ; v2(24.75,21.85) 25.13,21.85 25.28,21.7 v2(28.38,21.7) ; 24.75,19.3 24.75,17.85 22.4,15.5 19.75,15.5 v2(18.65,14.4) 17.9,15.15 v2(17.9,17.43) ; 24.75,19.3 25.25,18.8 26.9,18.8 27.4,18.3 27.4,16.5 27.81,16.09 29.64,16.09 v2(29.97,15.75) 30.45,15.75 31.3,14.9 31.3,11.4 32.95,9.75 v2(32.95,9.05) 33.29,8.71 34.2,8.71 34.5,8.41 v2(34.5,7.6) ; v1(56.44,19.24) 58.16,19.24 58.4,19 59.6,19 v2(60.1,19.5)
  VCC-4 w0.4: v2(60.1,19.5) 60.9,19.5 62.5,17.9 65.3,17.9 67.5,20.1 68.1,20.1 ; v2(35.81,7.93) 35.33,8.41 34.5,8.41 ; v2(67.3,20.9) 68.1,20.1 ; 68.1,20.1 71.5,20.1 71.5,18.8 70.92,18.22 v2(70.92,13.31) 70.92,12.52 67.9,9.5 v2(67.9,8.62)
  BOTTOM w0.2: v1(47.97,19.92) 47.97,19.09 47.58,18.7 C63.2 ; C106.2 49.64,4.26 v1(49.8,4.1) ; v1(48.2,4.1) 48.04,3.94 C107.2 48.04,3.47 48.1,3.42 C113.2 ; v1(47.18,22.85) 47.3,22.97 C48.2 ; C79.2 48.04,10.34 v1(48.2,10.5) 48.04,10.66 C76.2 ; C93.2 48.36,7.14 v1(48.2,7.3) 48.36,7.46 C90.2 ; C101.2 47.86,6.04 v1(48.2,5.7) 47.98,5.48 C104.2 ; C86.2 52.84,8.26 v1(53,8.1) ; C98.2 v1(53.8,7.3) ; C74.1 47.6,11.9 v1(47.4,12.1) ; C84.2 56.37,9.53 v1(56.2,9.7) 56.37,9.87 C83.2 ; C75.2 v1(52.2,11.3) 52.15,11.35 ; C89.2 v1(55.4,7.3)
  BOTTOM w0.25: C105.2 52.89,4.84 v1(52.98,4.93) ; C99.2 57.95,6.45 v1(57.05,6.45) 57.1,6.51 C92.2
  BOTTOM w0.28: U13.3 73.45,16.28 73.07,15.9 70.2,15.9 69.9,16.2 67.1,16.2 66.65,15.75 J8.11
  BOTTOM w0.3: v2(60.1,19.5) 60.1,19.15 59.9,18.95 R42.1 ; R54.2 40.3,8.7 39.3,9.7 36.5,9.7 35.81,9.01 v2(35.81,7.93) ; J9.11 v2(29.97,15.75) ; C72.1 70.63,13.6 v2(70.92,13.31) 71.19,13.04 72.36,13.04 72.6,12.8 72.6,12.04 Y3.4 ; v1(57.19,22.85) 57.64,23.3 C46.2 ; v2(34.5,7.6) 34.5,5.8 33.8,5.1 32.44,5.1 31.86,4.52 31.86,3.37 32.44,2.8 35.2,2.8 35.5,3.1 R61.1 ; v1(56.44,19.24) 57.04,19.24 57.5,19.7 R39.1
  BOTTOM w0.4: v2(72.3,25.68) 72.3,25 72.8,24.5 ; 72.8,24.5 71.6,24.5 71.5,24.6 v2(71.5,25.23) ; 72.8,24.5 C58.1 ; 72.8,24.5 73.1,24.8 v2(73.1,25.23) ; C109.2 40.89,3.11 40.88,3.1 R58.1 R59.1 R60.1 R61.1 ; U13.1 74.42,18.75 74.87,18.3 74.87,17.39 74.33,16.85 U13.3 ; C87.2 68.22,8.3 v2(67.9,8.62) ; v2(45.4,25.1) 45.6,25.3 C35.2 45.1,25.9 44.69,25.48 R27.1 ; R44.2 v2(17.9,17.43) ; v2(40.85,24.8) 40.85,25.18 41.12,25.45 R32.1 R34.1 ; C60.2 v2(67.3,20.9)
  BOTTOM w0.45: Y2.4 20.37,14.09 20.06,14.4 C70.1 v2(18.65,14.4) C69.2
  BOTTOM w0.5: R50.2 74.5,11.48 73.97,12.01 Y3.4
  BOTTOM w0.6: U13.1 73.45,19.37 73.1,19.72 C62.2 73.1,21 72.8,21.3 C58.1
